# Altium PCB GTU-V1.1-20160516 .PcbDoc (part 1 of 4)
Units mil, origin at the board's own origin, x right, y up, seen from the top; angles counter-clockwise.
Board outline 6299.21 x 4330.71 mil, 4 copper layers (Top Layer, POWER, GND, Bottom Layer); 208 components, 165 nets, 695 pads, 347 vias.
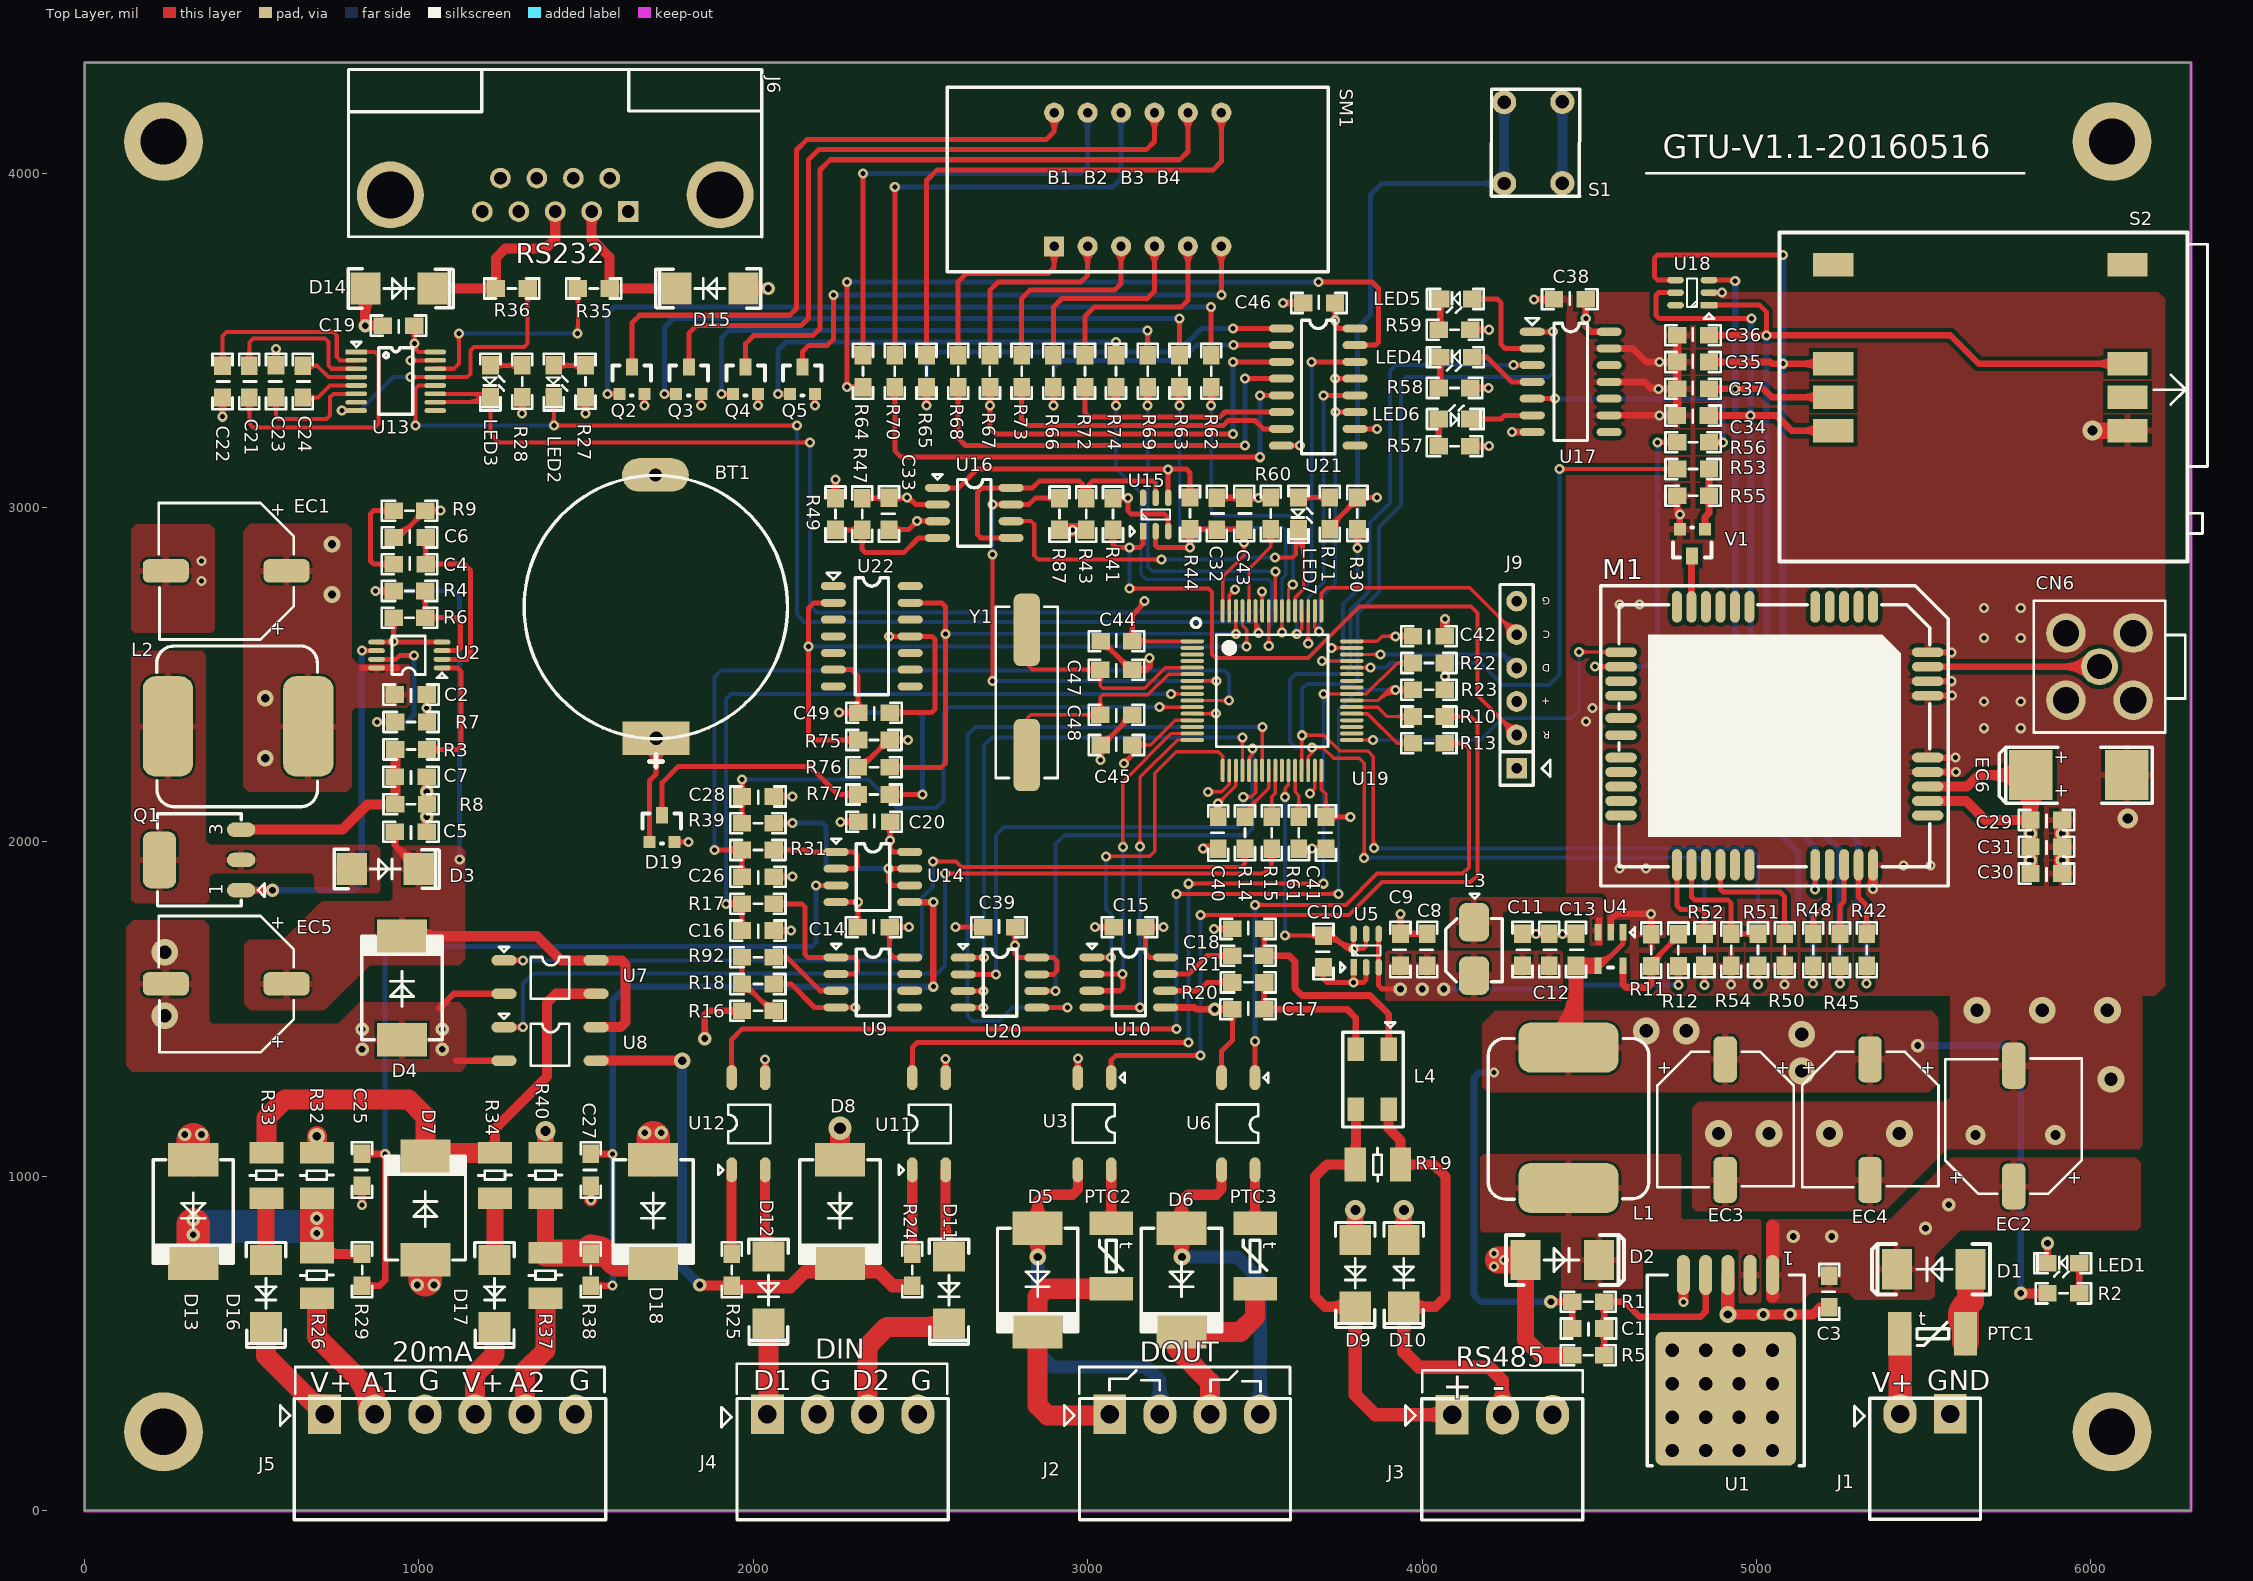
[diagram p0: Top Layer view]
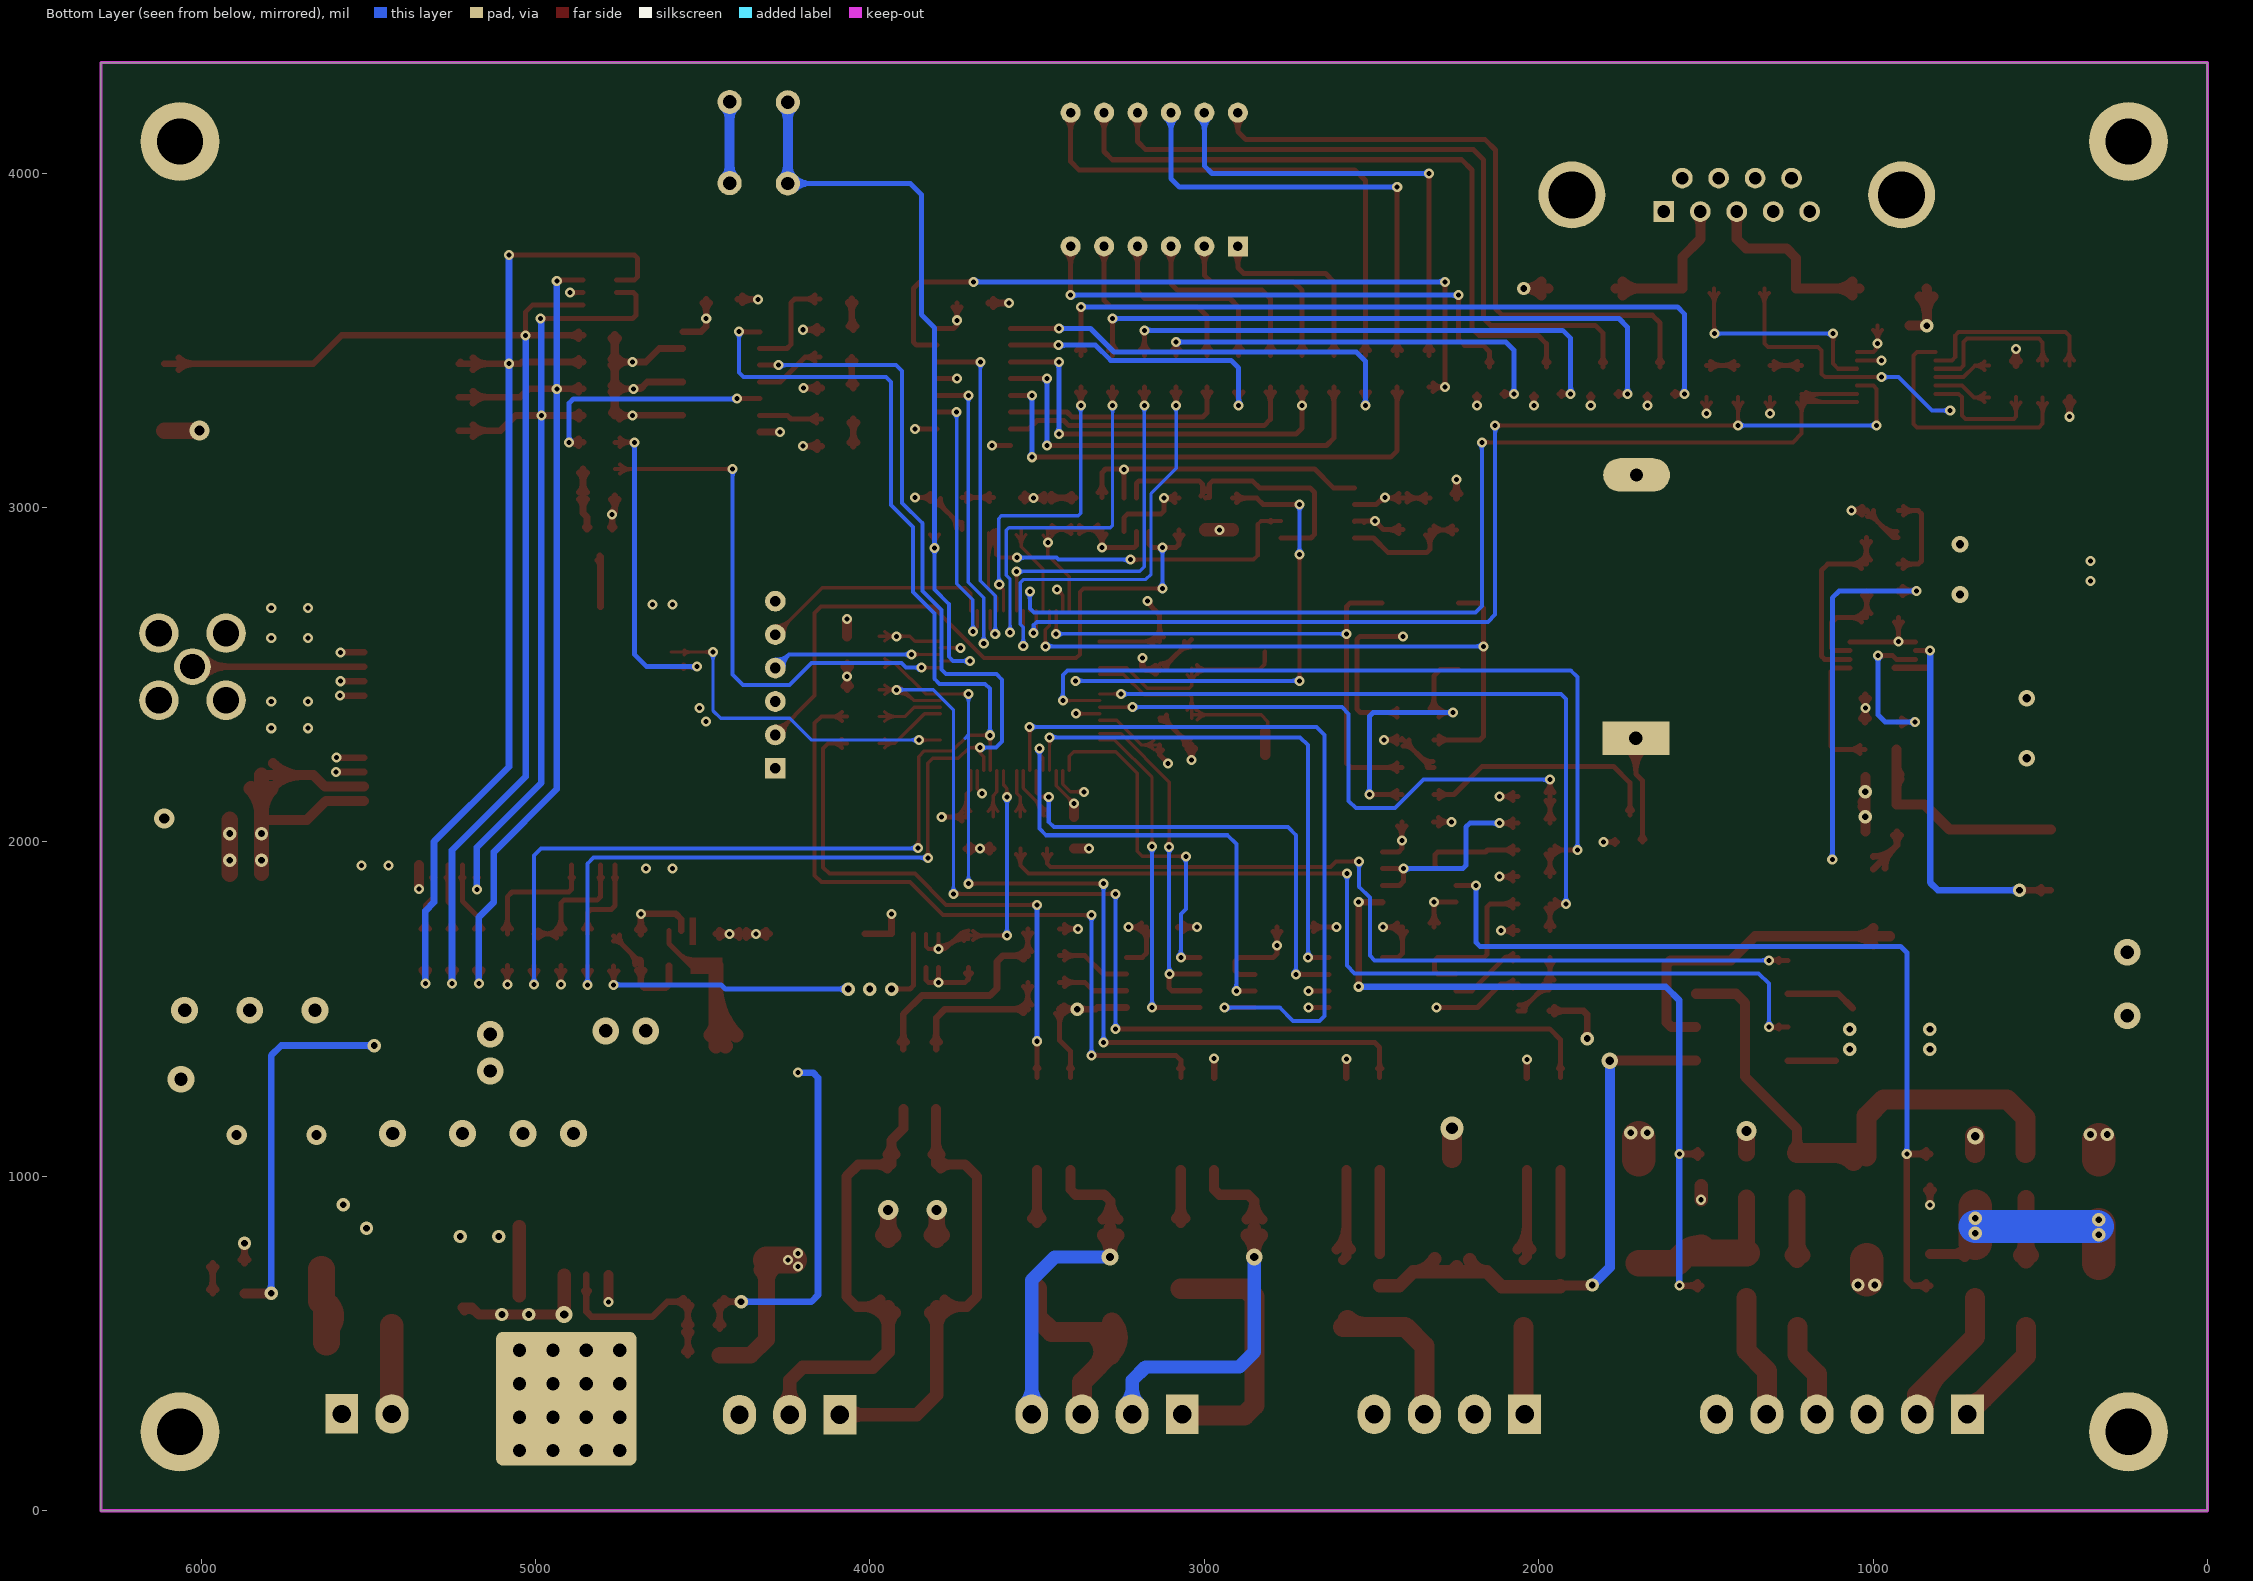
[diagram p1: Bottom Layer view, seen from below]
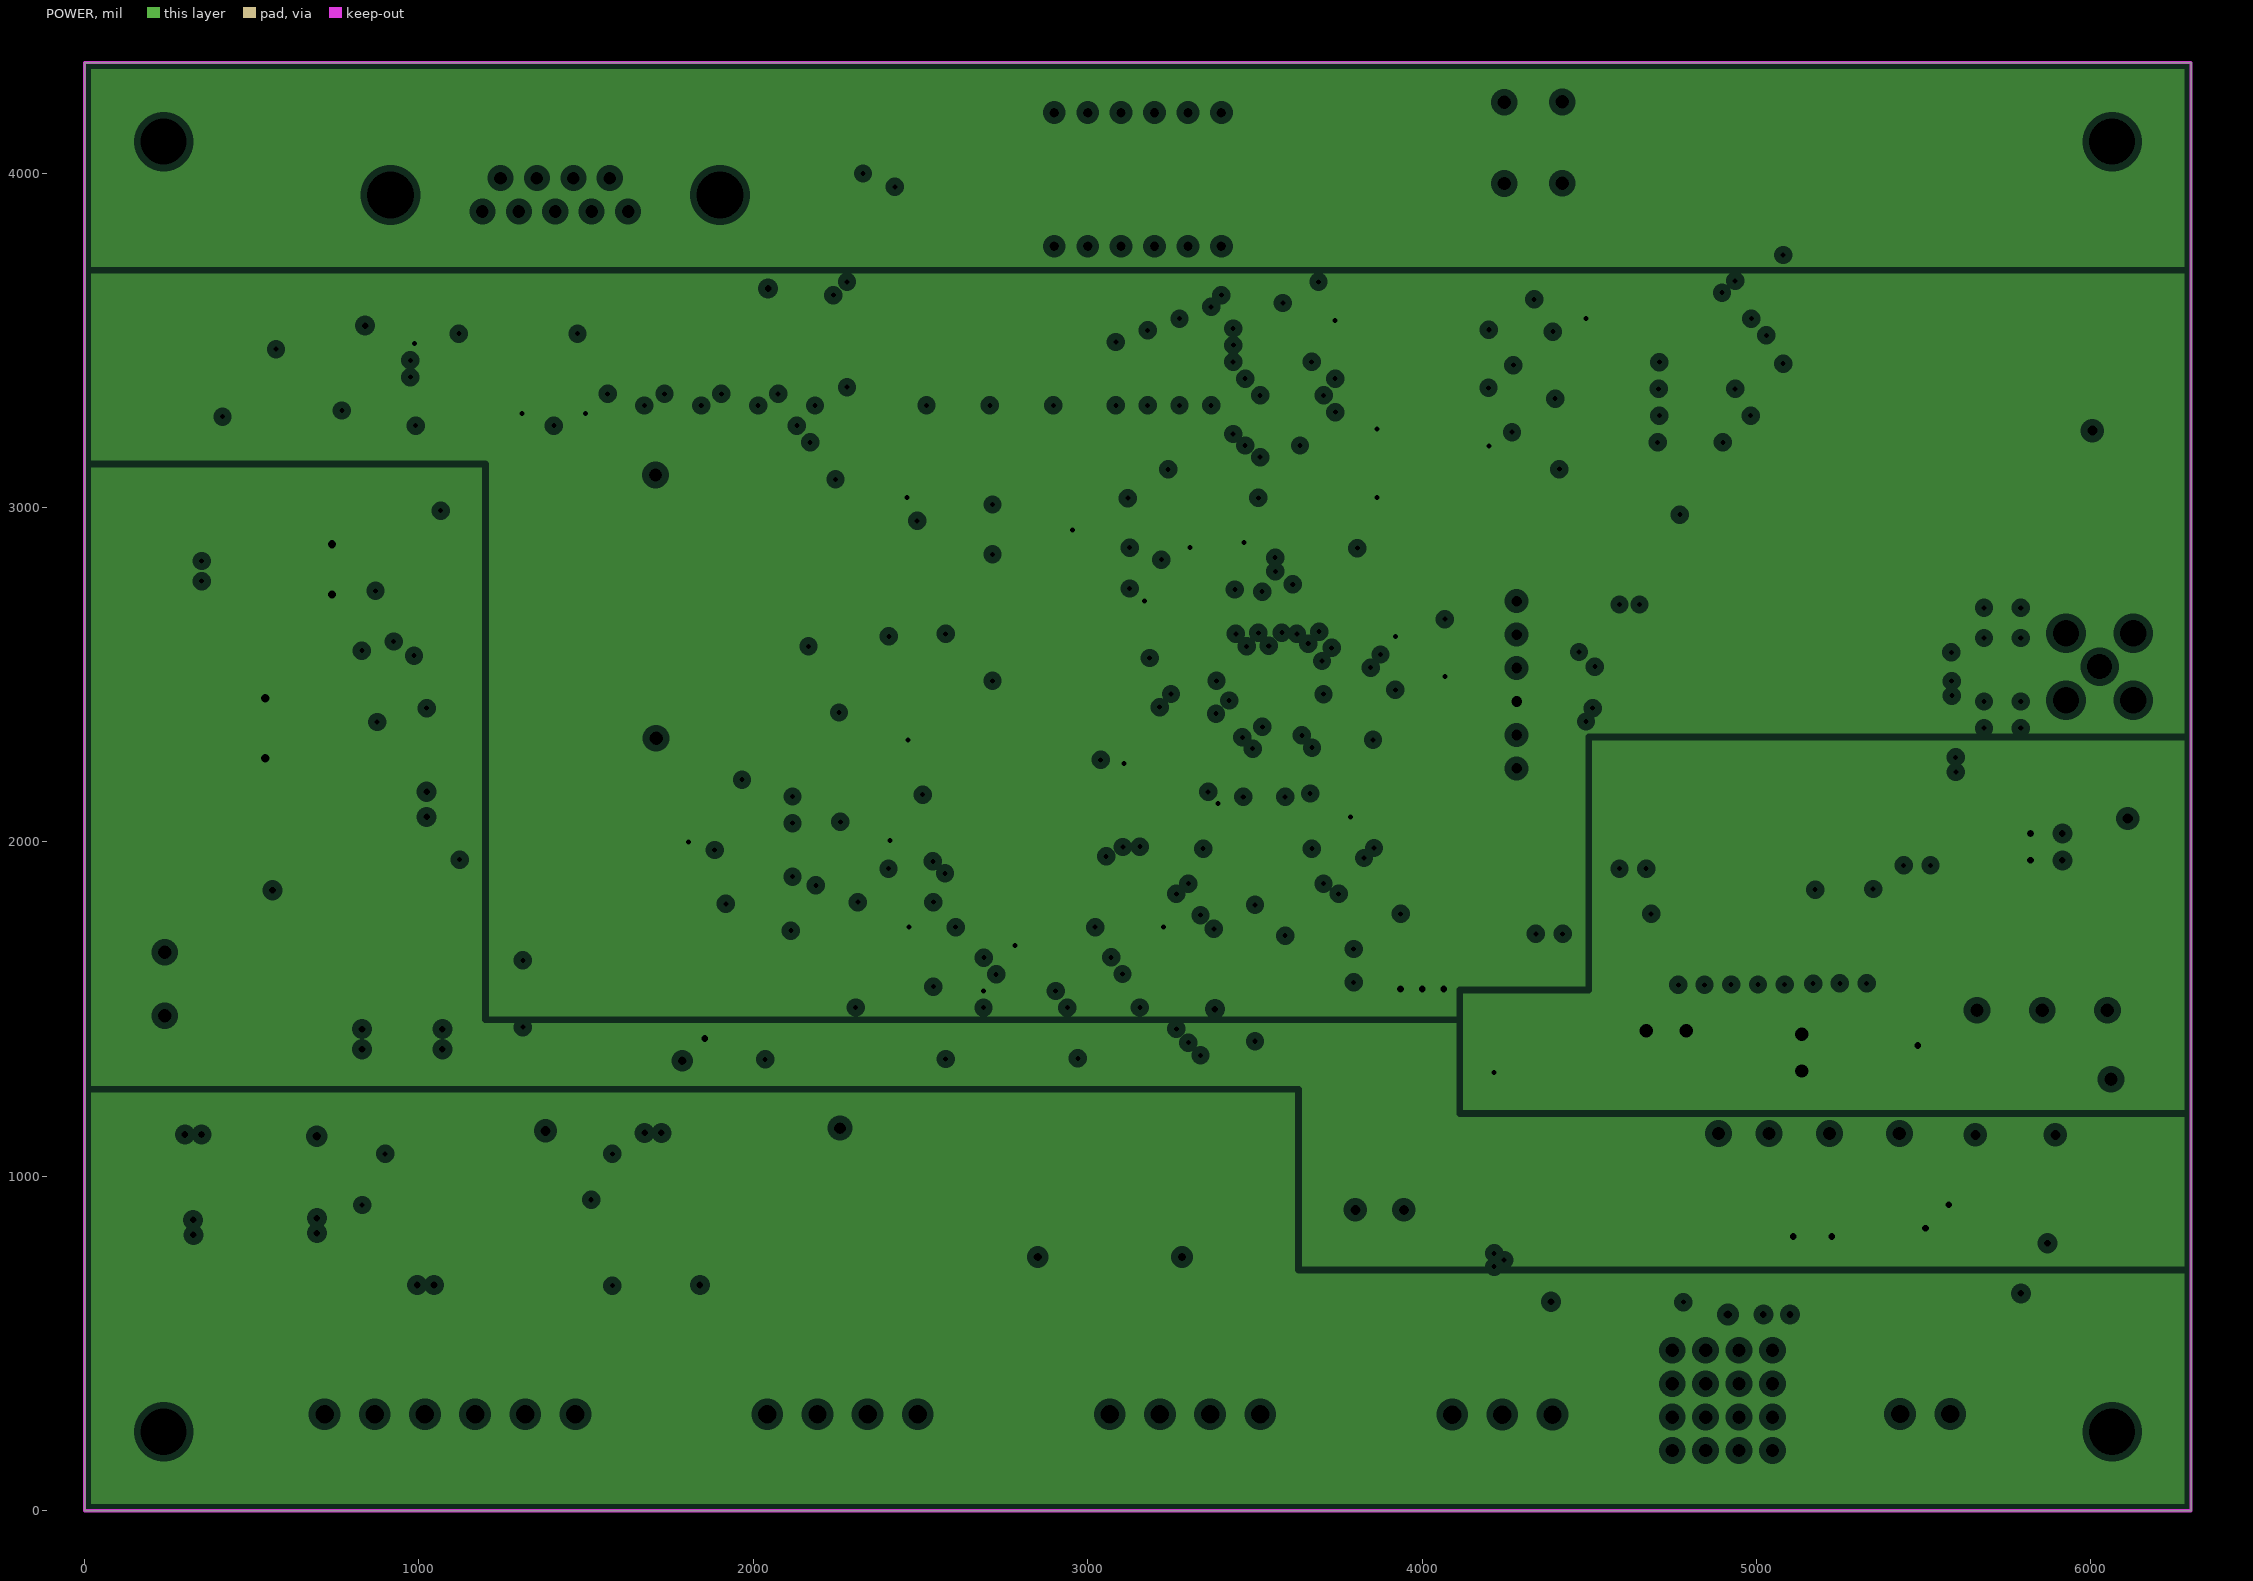
[diagram p2: POWER, clearances drawn from the general rule]
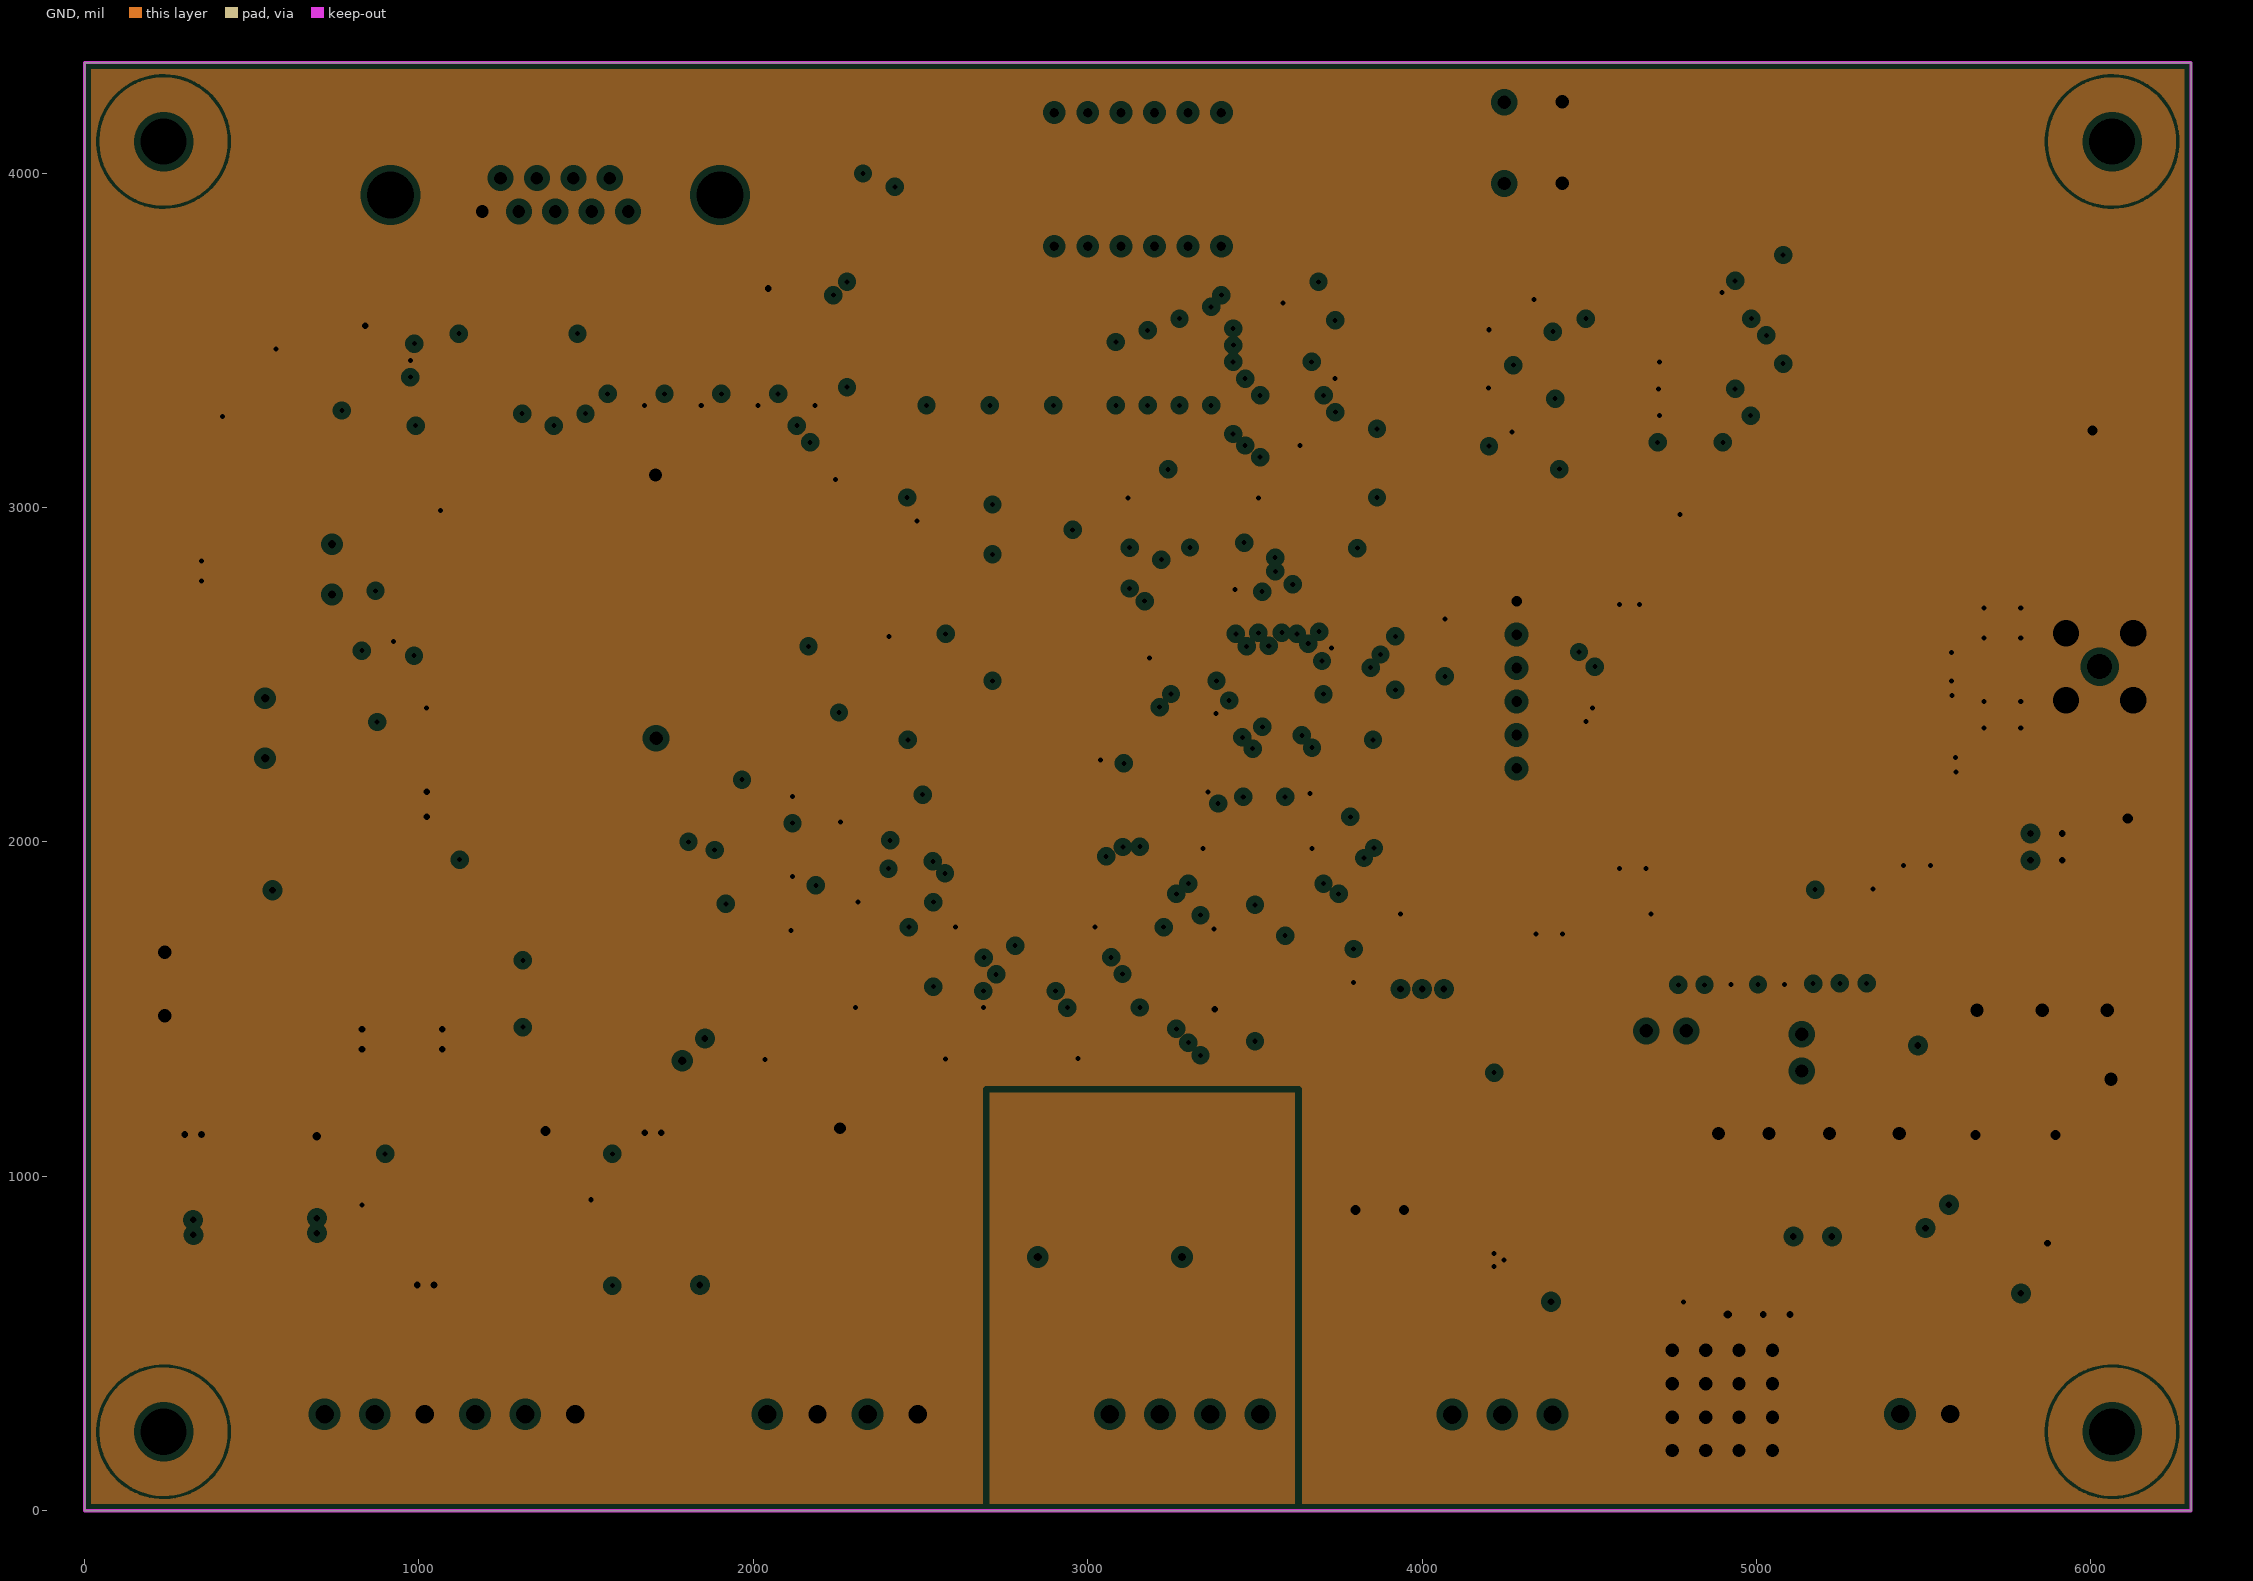
[diagram p3: GND, clearances drawn from the general rule]

## Layer stack, top to bottom
Top Layer: signal copper 1.4
Dielectric: core 12.6, FR-4, Dk 4.8
POWER: plane copper 1.4, net VCC_3V
Dielectric: prepreg 12.6, FR-4, Dk 4.8
GND: plane copper 1.4, net GND
Dielectric: core 12.6, FR-4, Dk 4.8
Bottom Layer: signal copper 1.4

## Board outline
0,0 6299.21,0 6299.21,4330.71 0,4330.71

## Design rules (kind name [scope] priority, off if disabled: settings)
Clearance [All] p1: gap=7
ComponentClearance [All] p1: gap=10 collisioncheckmode=3 verticalgap=10
HoleSize [All] p1: absolutevalues=TRUE maxlimit=300 minlimit=1 maxpercent=80.000 minpercent=20.000
PlaneClearance [All] p1: clearance=20
PlaneConnect [All] p1: planeconnectstyle=Relief reliefexpansion=20 reliefentries=4 reliefconductorwidth=10 reliefairgap=10
PolygonConnect 4 [(InComponent('CN6'))] p1: connectstyle=Direct reliefconductorwidth=10 reliefentries=4 polygonreliefangle="90 Angle"
PolygonConnect 3 [(InPadClass('All Pads'))] p2: connectstyle=Relief reliefconductorwidth=20 reliefentries=4 polygonreliefangle="90 Angle"
PolygonConnect 2 [(InNet('GND'))] p3: connectstyle=Direct reliefconductorwidth=20 reliefentries=4 polygonreliefangle="90 Angle"
PolygonConnect PolygonConnect_1 [All] p4: connectstyle=Relief reliefconductorwidth=10 reliefentries=4 polygonreliefangle="90 Angle"
RoutingVias [All] p1: holewidth=28 width=50 viastyle="Through Hole" minholewidth=15 minwidth=30 maxholewidth=150 maxwidth=300
SolderMaskExpansion [All] p1: expansion=4
TestPointUsage [All] p1: valid=0 allowmultiple=FALSE
Testpoint [All] p1: side=15 testpointundercomponent=TRUE minsize=40 maxsize=100 preferedsize=60 minholesize=0 maxholesize=40 preferedholesize=32 testpointgrid=1 style=1023 order=0-112345678
Width [All] p1: maxlimit=200 minlimit=10 preferedwidth=10
15 further rules are at their usual default settings.

## Classes and differential pairs
component class GTU-1-V1.0-20160311: C1 C2 C3 C4 C5 C6 C7 C8 C9 C10 C11 C12 C13 C14 C15 C16 C17 C18 C19 C20 C21 C22 C23 C24 C25 C26 C27 C28 D1 D2 D3 D4 D5 D6 D7 D8 D9 D10 D11 D12 D13 D14 D15 D16 D17 D18 EC1 EC2 EC3 EC4 EC5 J1 J2 J3 J4 J5 J6 L1 L2 L3 L4 LED1 LED2 LED3 PTC1 PTC2 PTC3 Q1 R1 R2 R3 R4 R5 R6 R7 R8 R9 R10 R11 R12 R13 R14 R15 R16 R17 R18 R19 R20 R21 R22 R23 R24 R25 R26 R27 R28 R29 R31 R32 R33 R34 R35 R36 R37 R38 R39 R40 R92 U1 U2 U3 U4 U5 U6 U7 U8 U9 U10 U11 U12 U13 U14
component class GTU-2-V1.0-20160311: BT1 C29 C30 C31 C32 C33 C34 C35 C36 C37 C38 C39 C40 C41 C42 C43 C44 C45 C46 C47 C48 C49 CN6 D19 EC6 J9 LED4 LED5 LED6 LED7 M1 Q2 Q3 Q4 Q5 R30 R41 R42 R43 R44 R45 R47 R48 R49 R50 R51 R52 R53 R54 R55 R56 R57 R58 R59 R60 R61 R62 R63 R64 R65 R66 R67 R68 R69 R70 R71 R72 R73 R74 R75 R76 R77 R87 S1 S2 SM1 U15 U16 U17 U18 U19 U20 U21 U22 V1 Y1
component class GTU原理图目录V1.0-20160311: *

## Components (designator, comment, footprint, x,y, rotation, side; value= is the part's Value field where it differs from the comment)
BT1 "CR2032" CR2032 1709.21,2310 r270 top locked
C1 "0.022u" 0805-C 4449.21,545 r0 top
C2 "0.1u" 0805-C 928.21,2440.61 r0 top
C3 "0.01u/50V" 0805-C 5217.6,703 r270 top
C4 "0.1u" 0805-C 1020.21,2830.61 r180 top
C5 "0.1u" 0805-C 928.21,2030.61 r0 top
C6 "0.1u" 0805-C 1020.21,2910.61 r180 top
C7 "0.1u" 0805-C 928.21,2194.61 r0 top
C8 "0.1u" 0805-C 4015,1630 r90 top
C9 "0.1u" 0805-C 3935,1630 r90 top
C10 "0.1u" 0805-C 3705,1720 r270 top
C11 "10u" 0805-C 4300,1630 r90 top
C12 "10u" 0805-C 4380,1630 r90 top
C13 "10u" 0805-C 4460,1630 r90 top
C14 "0.1u" 0805-C 2407.6,1745 r180 top
C15 "0.1u" 0805-C 3172.6,1745 r180 top
C16 "0.1u" 0805-C 1966.21,1735 r0 top
C17 "27p" 0805-C 3527.6,1500 r180 top
C18 "27p" 0805-C 3527.6,1740 r180 top
C19 "0.1u" 0805-C 891.21,3544 r0 top
C20 "0.1u" 0805-C 2409.21,2060 r180 top
C21 "0.1u" 0805-C 492.71,3329 r90 top
C22 "0.1u" 0805-C 412.71,3329 r90 top
C23 "0.1u" 0805-C 572.71,3425 r270 top
C24 "0.1u" 0805-C 652.71,3329 r90 top
C25 "4.7u" 0805-C 830,1067 r270 top
C26 "510p" 0805-C 1966.21,1896 r0 top
C27 "4.7u" 0805-C 1513.6,1067 r270 top
C28 "510p" 0805-C 1966.21,2136 r0 top
C29 "0.1u" 0805-C 5819.21,2065.39 r0 top
C30 "10pF" 0805-C 5819.21,1985.39 r0 top
C31 "33p" 0805-C 5819.21,1905.39 r0 top
C32 "0.1u" 0805-C 3385.6,2934 r90 top
C33 "0.1u" 0805-C 2405.6,3029 r270 top
C34 "0.1u" 0805-C 4761.6,3275 r0 top
C35 "33p" 0805-C 4857.6,3435 r180 top
C36 "33p" 0805-C 4857.6,3515 r180 top
C37 "33p" 0805-C 4857.6,3355 r180 top
C38 "0.1u" 0805-C 4489.21,3622.61 r180 top
C39 "0.1u" 0805-C 2782.6,1745 r180 top
C40 "0.1u" 0805-C 3390,2075 r270 top
C41 "0.1u" 0805-C 3712.6,2075 r270 top
C42 "0.1u" 0805-C 3972.6,2615 r0 top
C43 "0.1u" 0805-C 3467.6,2934 r90 top
C44 "0.1u" 0805-C 3133.6,2600 r180 top
C45 "10u" 0805-C 3133.6,2290 r180 top
C46 "0.1u" 0805-C 3739.21,3611.61 r180 top
C47 "20p" 0805-C 3037.6,2515 r0 top
C48 "20p" 0805-C 3037.6,2380 r0 top
C49 "1u" 0805-C 2313.21,2386.67 r0 top
CN6 "SMA-KWHD" SMA-KWHD 6025.6,2524 r0 top locked
D1 "SS34" SMB 5639.6,722 r180 top
D2 "SS34" SMB 4309.21,750 r0 top
D3 "MBRA1H100T3G" SMA 799.21,1919 r0 top
D4 "5.0SMDJ30A" SMC 949.21,1408 r270 top
D5 "5.0SMDJ30A" SMC 2850.21,845 r90 top locked
D6 "5.0SMDJ30A" SMC 3280.21,845 r90 top
D7 "5.0SMDJ30A" SMC 1019.21,750 r270 top
D8 "5.0SMDJ30A" SMC 2259.21,1050 r90 top
D9 "5.0SMDJ12A" SMA 3800,810 r270 top
D10 "5.0SMDJ12A" SMA 3945,810 r270 top
D11 "SM4007" SMA 2585.21,760 r270 top
D12 "SM4007" SMA 2045.21,760 r270 top
D13 "SMDJ5.0A" SMC 325.21,1050 r90 top
D14 "1SMAxxCAT3G" SMA 840.21,3655 r0 top
D15 "1SMA12CAT3G" SMA 1970.21,3655 r180 top
D16 "SM4007" SMA 542.6,750 r270 top
D17 "SM4007" SMA 1226.2,750 r270 top
D18 "SMDJ5.0A" SMC 1700.21,1050 r90 top
D19 "BAT54C" BAT54S/SOT-23 1689.21,2000 r0 top
EC1 "150u/63V" SMD10X10.5 603.95,2810.61 r270 top locked
EC2 "CAP Al" SMD10X10.5 5769.21,970 r180 top locked
EC3 "470u/25V" SMD10X10.5 4906.21,1350 r0 top locked
EC4 "470u/25V" SMD10X10.5 5339.21,1350 r0 top
EC5 "150u/63V" SMD10X10.5 603.95,1575.61 r270 top
EC6 "100uF" 7361-V 5820.21,2200 r180 top
J1 "CON2" 15EDGRC-3.81-2P 5669.6,336.63 r180 top locked
J2 "CON4" 15EDGRC-3.81-4P 2975.21,335.63 r0 top locked
J3 "CON3" 15EDGRC-3.81-3P 3999.21,334.65 r0 top locked
J4 "CON4" 15EDGRC-3.81-4P 1951.21,335.63 r0 top locked
J5 "20mA输入" 15EDGRC-3.81-6P 627.21,335.63 r0 top locked
J6 "DB9针" DB9RA/M 1625.6,3885 r0 top
J9 "ST_SWD" SWD_DOWNLOAD 4282.6,2220 r180 top
L1 "SLF12575T-470M2R7-PF" SLF12575 4437.6,965 r90 top
L2 "SLF12555T-221" SLF12575 249.21,2345.61 r0 top
L3 "SPM4020T-4R7M" SPM4020T-4R7M 4155,1680 r270 top locked
L4 "ACT45B-510-2P" ACT45B 3900,1380 r270 top
LED1 "绿色" 0805-LED 5965,740 r180 top
LED2 "LED" 0805-LED 1403.38,3425 r270 top
LED3 "LED" 0805-LED 1213.71,3425 r270 top
LED4 "RED" 0805-LED 4149.21,3449.61 r180 top
LED5 "RED" 0805-LED 4149.21,3623.61 r180 top
LED6 "RED" 0805-LED 4049.21,3264.61 r0 top
LED7 "LED" 0805-LED 3630.1,3030 r270 top
M1 "M35" M35 5348.6,2703 r270 top locked
PTC1 "1812014" 1812l075 5428.6,529 r0 top
PTC2 "1812010" 1812l075 3070.21,860 r270 top
PTC3 "1812010" 1812l075 3500.21,860 r270 top
Q1 "NDT3055" SOT-223 468.31,1855.61 r90 top
Q2 "MMBT5551" SOT-23 1599.21,3340 r0 top
Q3 "MMBT5551" SOT-23 1769.21,3340 r0 top
Q4 "MMBT5551" SOT-23 1939.21,3340 r0 top
Q5 "MMBT5551" SOT-23 2109.21,3340 r0 top
R1 "2K3/1%" 0805-R 4544.21,625 r180 top
R2 "1K" 0805-R 5870,650 r0 top
R3 "RES" 0805-R 1024.21,2276.61 r180 top
R4 "RES" 0805-R 1019.21,2750.61 r180 top
R5 "1K/1%" 0805-R 4544.21,465 r180 top
R6 "RES" 0805-R 924.21,2670.61 r0 top
R7 "RES" 0805-R 1024.21,2358.61 r180 top
R8 "RES" 0805-R 1024.21,2112.61 r180 top
R9 "RES" 0805-R 1019.21,2990.61 r180 top
R10 "RES" 0805-R 3972.6,2375 r0 top
R11 "200K" 0805-R 4685,1724 r270 top
R12 "806K" 0805-R 4766.21,1724 r270 top
R13 "RES" 0805-R 3972.6,2295 r0 top
R14 "RES" 0805-R 3470,2075 r270 top
R15 "RES" 0805-R 3550,2075 r270 top
R16 "RES" 0805-R 2061.21,1495 r180 top
R17 "RES" 0805-R 2061.21,1815 r180 top
R18 "RES" 0805-R 2061.21,1575 r180 top
R19 "120R" 1210-R 3800.21,1035 r0 top
R20 "10R" 0805-R 3527.6,1580 r180 top
R21 "10R" 0805-R 3527.6,1660 r180 top
R22 "RES" 0805-R 3972.6,2535 r0 top
R23 "RES" 0805-R 3972.6,2455 r0 top
R24 "RES" 0805-R 2475.21,673 r90 top
R25 "RES" 0805-R 1935.21,673 r90 top
R26 "33R" 1210-R 694.8,771 r270 top
R27 "RES" 0805-R 1498.21,3425 r270 top
R28 "RES" 0805-R 1308.55,3425 r270 top
R29 "200K" 0805-R 830,673 r90 top
R30 "1K" 0805-R 3806.35,2935 r90 top
R31 "51R" 0805-R 1966.21,1976 r0 top
R32 "150R" 1210-R 694.8,1070 r270 top
R33 "33R" 1210-R 543.6,1070 r270 top
R34 "33R" 1210-R 1227.2,1070 r270 top
R35 "RES" 0805-R 1570.21,3655 r180 top
R36 "RES" 0805-R 1230.21,3655 r0 top
R37 "33R" 1210-R 1378.4,771 r270 top
R38 "200K" 0805-R 1513.6,673 r90 top
R39 "51R" 0805-R 1966.21,2056 r0 top
R40 "150R" 1210-R 1378.4,1070 r270 top
R41 "RES" 0805-R 3075.6,3028 r270 top
R42 "20R" 0805-R 5329.21,1725 r270 top
R43 "10K" 0805-R 2995.6,3028 r270 top
R44 "10K" 0805-R 3305.6,3030 r270 top
R45 "20R" 0805-R 5249.21,1725 r270 top
R47 "1.6K" 0805-R 2325.6,2933 r90 top
R48 "20R" 0805-R 5169.21,1725 r270 top
R49 "402R" 0805-R 2245.6,3028 r270 top
R50 "0R" 0805-R 5084.21,1725 r270 top
R51 "1K" 0805-R 5004.21,1725 r270 top
R52 "1K" 0805-R 4844.21,1725 r270 top
R53 "4.7K" 0805-R 4762.6,3115 r0 top
R54 "5K6" 0805-R 4924.21,1630 r90 top
R55 "4.7K" 0805-R 4857.6,3035 r180 top
R56 "4K7" 0805-R 4762.6,3195 r0 top
R57 "1K" 0805-R 4144.21,3183.61 r180 top
R58 "1K" 0805-R 4049.21,3357.61 r0 top
R59 "1K" 0805-R 4049.21,3531.61 r0 top
R60 "510R" 0805-R 3547.6,3030 r270 top
R61 "510R" 0805-R 3631.35,2075 r270 top
R62 "RES" 0805-R 3369.21,3360 r90 top
R63 "RES" 0805-R 3274.21,3360 r90 top
R64 "330R" 0805-R 2328.05,3360 r90 top
R65 "330R" 0805-R 2517.71,3360 r90 top
R66 "330R" 0805-R 2897.05,3360 r90 top
R67 "330R" 0805-R 2707.38,3360 r90 top
R68 "330R" 0805-R 2612.55,3360 r90 top
R69 "RES" 0805-R 3179.21,3360 r90 top
R70 "330R" 0805-R 2422.88,3360 r90 top
R71 "510R" 0805-R 3723.85,3030 r270 top
R72 "330R" 0805-R 2991.88,3360 r90 top
R73 "330R" 0805-R 2802.21,3360 r90 top
R74 "RES" 0805-R 3084.21,3360 r90 top
R75 "20K" 0805-R 2313.21,2305 r0 top
R76 "20K" 0805-R 2408,2223 r180 top
R77 "1K" 0805-R 2408,2142 r180 top
R87 "10K" 0805-R 2915.6,3028 r270 top
R92 "RES" 0805-R 2061.21,1655 r180 top
S1 "SW-PB" JMP 4419.21,3970 r90 top
S2 "SIMHOLDER" SIM-HOLDER 6109.21,3230 r180 top locked
SM1 "SR420361K" SR420361 2899.6,3781 r0 top locked
U1 "LM2596" D2PAK-5 5047.6,705 r180 top locked
U2 "LM3488" MSOP-8 1069.21,2520.61 r180 top locked
U3 "TLP187" TLP187 3070.21,1295 r270 top
U4 "NCP1529ASNT1G" SOT-23-5 4600.83,1729.78 r180 top
U5 "ADR3425ARJZ" SOT-23-6 3795,1625 r0 top locked
U6 "TLP187" TLP187 3500.21,1295 r270 top
U7 "TLP187" TLP187 1254.21,1646 r0 top locked
U8 "TLP187" TLP187 1254.21,1446 r0 top locked
U9 "OPA2340UA" SO-8 2247.6,1655 r0 top locked
U10 "ISL83075EIBZA" SO-8 3012.6,1655 r0 top locked
U11 "TLP187" TLP187 2475.21,1019.41 r90 top
U12 "TLP187" TLP187 1935.21,1019.41 r90 top
U13 "SP3232EEY" TSSOP-16 812.71,3465 r0 top locked
U14 "OPA2340UA" SO-8 2247.6,1970 r0 top locked
U15 "NLAST4599DTT1G" SOT-23-6 3165.6,2929 r0 top
U16 "CAT706SVI" SO-8 2550.6,3059 r0 top locked
U17 "74HC04" SO-14 4329.21,3525.61 r0 top
U18 "CM1213A-04SO" SOT-23-6 4857.6,3605 r90 top
U19 "STM32F103RCT6" LQFP-64 3312.6,2600 r0 top locked
U20 "FM25L16B" SO-8 2627.6,1654.22 r0 top locked
U21 "74HC595" SO-16 3579.21,3535.39 r0 top locked
U22 "RX-8025SA" SO-14 2239.21,2765 r0 top
V1 "MMBT5551" SOT-23 4845.6,2935 r180 top
Y1 "8MHz" SM-49 2817.6,2260 r90 top locked

## Footprints (in the part's own frame and the unit in brackets; to place one, negate y for a bottom-side part, rotate by r counter-clockwise, add the part's x,y. Pads: shape width x height; smd on the part's side, far side on the other; paste and mask are expansions set on the pad)
15EDGRC-3.81-2P [mm]
  rect 2.5x3 hole 1.4: 1(2.3,1.2)
  oval 2.5x3 hole 1.4: 2(6.11,1.2)
  silkscreen extent 0,0 8.41,9.2
15EDGRC-3.81-3P [mm]
  rect 2.5x3 hole 1.4: 1(2.3,-1.2)
  oval 2.5x3 hole 1.4: 2(6.11,-1.2) 3(9.92,-1.2)
  silkscreen extent 0,-9.2 12.22,0
15EDGRC-3.81-4P [mm]
  rect 2.5x3 hole 1.4: 1(2.3,-1.2)
  oval 2.5x3 hole 1.4: 2(6.11,-1.2) 3(9.92,-1.2) 4(13.73,-1.2)
  silkscreen extent 0,-9.2 16.03,0
15EDGRC-3.81-6P [mm]
  rect 2.5x3 hole 1.4: 1(2.3,-1.2)
  oval 2.5x3 hole 1.4: 2(6.11,-1.2) 3(9.92,-1.2) 4(13.73,-1.2) 5(17.54,-1.2) 6(21.35,-1.2)
  silkscreen extent 0,-9.2 23.65,0
0805-C [mil]
  rect 55x50 smd: 1(0,0) 2(95,0)
  silkscreen extent -35,-30 131,30
0805-LED [mil]
  rect 55x50 smd: 1(0,0) 2(95,0)
  silkscreen extent -35,-30 135,41
0805-R [mil]
  rect 55x50 smd: 1(0,0) 2(95,0)
  silkscreen extent -35,-30 130,30
1210-R [mil]
  rect 64x102 smd: 1(0,0) 2(135,0)
  silkscreen extent 53,-50 79,50
1812l075 [mil]
  rect 70x130 smd: 1(0,0) 2(196.06,0)
  silkscreen extent 51,-35 146,35
7361-V [mil]
  rect 130x150 smd: 1(0,0) 2(-287.4,0)
  silkscreen extent -363,-83 95,84
ACT45B [mil]
  rect 70x50 smd: 1(0,0) 2(0,-98.43) 3(179.13,-98.43) 4(179.13,0)
  silkscreen extent -80,-138 232,43
BAT54S/SOT-23 [mil]
  rect 36x36 smd: 1(0,0) 2(75,0)
  rect 36x50 smd: 3(38,80)
  silkscreen extent -20,-5 95,85
CR2032 [mil]
  rect 100x200 hole 40: 1(0,0)
  oval 100x200 hole 40: 2(-787.4,-1.97)
  silkscreen extent -786,-395 87,393
D2PAK-5 [mil]
  rrect10% 420x400 smd far side: 0(140,370)
  oval 39.17x120 smd: 1(0,0) 2(66.67,0) 3(133.33,0) 4(200,0) 5(266.67,0)
  rrect10% 420x400 smd: 1(140,370)
  silkscreen extent -95,0 375,570
DB9RA/M [mil]
  rect 62x62 hole 38: 1(0,0)
  round 62 hole 38: 2(-109,0) 3(-218,0) 4(-327,0) 5(-436,0) 6(-55,100) 7(-164,100) 8(-273,100) 9(-382,100)
  round 200 hole 140: ""(-711,50) ""(275,50)
  silkscreen extent -836,-75 400,425
JMP [mil]
  round 72 hole 40: 1(0,0) 2(-1,174) 3(242,174) 4(243,0)
  silkscreen extent -39,-53 281,213
LQFP-64 [mm]
  oval 1.778x0.3 smd: 1(0,0) 2(0,-0.5) 3(0,-1) 4(0,-1.5) 5(0,-2) 6(0,-2.5) 7(0,-3) 8(0,-3.5) 9(0,-4) 10(0,-4.5) 11(0,-5) 12(0,-5.5) 13(0,-6) 14(0,-6.5) 15(0,-7) 16(0,-7.5) 33(12.116,-7.5) 34(12.116,-7) 35(12.116,-6.5) 36(12.116,-6) 37(12.116,-5.5) 38(12.116,-5) 39(12.116,-4.5) 40(12.116,-4) 41(12.116,-3.5) 42(12.116,-3) 43(12.116,-2.5) 44(12.116,-2) 45(12.116,-1.5) 46(12.116,-1) 47(12.116,-0.5) 48(12.116,0)
  oval 0.3x1.778 smd: 17(2.308,-9.808) 18(2.808,-9.808) 19(3.308,-9.808) 20(3.808,-9.808) 21(4.308,-9.808) 22(4.808,-9.808) 23(5.308,-9.808) 24(5.808,-9.808) 25(6.308,-9.808) 26(6.808,-9.808) 27(7.308,-9.808) 28(7.808,-9.808) 29(8.308,-9.808) 30(8.808,-9.808) 31(9.308,-9.808) 32(9.808,-9.808) 49(9.808,2.308) 50(9.308,2.308) 51(8.808,2.308) 52(8.308,2.308) 53(7.808,2.308) 54(7.308,2.308) 55(6.808,2.308) 56(6.308,2.308) 57(5.808,2.308) 58(5.308,2.308) 59(4.808,2.308) 60(4.308,2.308) 61(3.808,2.308) 62(3.308,2.308) 63(2.808,2.308) 64(2.308,2.308)
  silkscreen extent -0.07,-8 10.31,1.75
M35 [mm]
  oval 2.4x0.75 smd: 1(0,0) 2(0,-1.1) 3(0,-2.2) 4(0,-3.3) 5(0,-4.4) 6(0,-9.4) 7(0,-10.5) 8(0,-11.6) 9(0,-12.7) 10(0,-13.8) 11(0,-14.9) 21(19.6,-14.9) 22(19.6,-13.8) 23(19.6,-12.7) 24(19.6,-11.6) 25(19.6,-10.5) 26(19.6,-9.4) 27(19.6,-4.4) 28(19.6,-3.3) 29(19.6,-2.2) 30(19.6,-1.1) 31(19.6,0)
  oval 0.75x2.4 smd: 12(3.45,-19.15) 13(4.55,-19.15) 14(5.65,-19.15) 15(6.75,-19.15) 16(11.45,-19.15) 17(12.55,-19.15) 18(13.65,-19.15) 19(14.75,-19.15) 20(15.85,-19.15) 32(15.85,4.15) 33(14.75,4.15) 34(13.65,4.15) 35(12.55,4.15) 36(11.45,4.15) 37(6.75,4.15) 38(5.65,4.15) 39(4.55,4.15) 40(3.45,4.15) 41(8.45,-19.15) 42(9.75,-19.15)
  silkscreen extent -1.6,-20.7 21.2,5.7
MSOP-8 [mil]
  oval 50x15 smd: 1(0,0) 2(0,-25.59) 3(0,-51.18) 4(0,-76.77) 5(196,-76.77) 6(196,-51.18) 7(196,-25.59) 8(196,0)
  silkscreen extent -15,-95 150,30
SIM-HOLDER [mil]
  rect 120x70 smd: 1(879.92,0) 2(879.92,-100) 3(879.92,-200) 4(0,0) 5(0,-100) 6(0,-200) 7(0,-496.06) 8(879.92,-496.06)
  silkscreen extent -239,-593 1041,392
SLF12575 [mil]
  rrect50% 150x300 smd: 1(0,0) 2(420,0)
  silkscreen extent -33,-240 447,240
SM-49 [mm]
  rrect50% 5.5x2 smd: 1(0,0) 2(9.5,0)
  silkscreen extent -1.75,-2.35 11.25,2.35
SMA [mil]
  rect 90x95 smd: A(0,0) K(200,0)
  silkscreen extent -52,-59 262,59
SMA-KWHD [mm]
  round 2.794 hole 1.905: 1(0,0)
  round 3 hole 2: 2(2.55,2.55) 3(2.55,-2.55) 4(-2.55,-2.55) 5(-2.55,2.55)
  silkscreen extent -5,-5 6.5,5
SMB [mil]
  rect 89.37x120 smd: A(0,0) K(220,0)
  silkscreen extent -58,-75 294,75
SMC [mil]
  rect 100x150 smd: A(0,0) K(-310,0)
  silkscreen extent -310,-120 0,120
SMD10X10.5 [mil]
  rrect50% 70x137.8 smd: 1(0,0) 2(0,-360.83)
  silkscreen extent -203,-382 205,22
SO-8 [mil]
  oval 75x24 smd: 1(0,0) 2(0,-50) 3(0,-100) 4(0,-150) 5(220,-150) 6(220,-100) 7(220,-50) 8(220,0)
  silkscreen extent -15,-175 160,40
SO-14 [mil]
  oval 75x24 smd: 1(0,0) 2(0,-50) 3(0,-100) 4(0,-150) 5(0,-200) 6(0,-250) 7(0,-300) 8(230,-300) 9(230,-250) 10(230,-200) 11(230,-150) 12(230,-100) 13(230,-50) 14(230,0)
  silkscreen extent -20,-325 165,40
SO-16 [mil]
  oval 75x24 smd: 1(0,0) 2(0,-50) 3(0,-100) 4(0,-150) 5(0,-200) 6(0,-250) 7(0,-300) 8(0,-350) 9(220,-350) 10(220,-300) 11(220,-250) 12(220,-200) 13(220,-150) 14(220,-100) 15(220,-50) 16(220,0)
  silkscreen extent 60,-375 160,25
SOT-23 [mil]
  rect 36x36 smd: 1(0,0) 2(75,0)
  rect 36x50 smd: 3(38,80)
  silkscreen extent -20,-5 95,85
SOT-23-5 [mil]
  rect 20x50 smd: 1(0,0) 2(37,0) 3(75,0) 4(75,100) 5(0,100)
  silkscreen extent -35,-15 45,105
SOT-23-6 [mil]
  rect 20x50 smd: 1(0,0)
  oval 20x50 smd: 2(37.5,0) 3(75,0) 4(75,100) 5(37.5,100) 6(0,100)
  silkscreen extent -40,-15 80,65
SOT-223 [mm]
  oval 1.1x2.15 smd: 1(0,0) 2(2.3,0) 3(4.6,0)
  rrect50% 4.318x2.54 smd: 4(2.3,6.2)
  silkscreen extent -1.2,-1.78 5.8,6.35
SPM4020T-4R7M [mm]
  rrect50% 2.92x2.3 smd: 1(-2.031,0) 2(2.031,0)
  silkscreen extent -4.19,-2.15 2.51,2.15
SR420361 [mil]
  rect 60x60 hole 28: 1(0,0)
  round 60 hole 28: 2(100,0) 3(200,0) 4(300,0) 5(400,0) 6(500,0) 7(500,400) 8(400,400) 9(300,400) 10(200,400) 11(100,400) 12(0,400)
  silkscreen extent -320,-76 820,476
SWD_DOWNLOAD [mil] "SWD方式下载程序接口"
  rect 62x62 hole 32: 1(0,0)
  round 62 hole 32: 2(0,-100) 3(0,-200) 4(0,-300) 5(0,-400) 6(0,-500)
  silkscreen extent -100,-550 50,50
TLP187 [mil]
  oval 75x32 smd: 1(0,0) 3(0,-100) 4(275.59,-100) 6(275.59,0)
  silkscreen extent -15,-115 195,40
TSSOP-16 [mil]
  rect 65x14 smd: 1(0,0)
  oval 65x14 smd: 2(0,-25) 3(0,-50) 4(0,-75) 5(0,-100) 6(0,-125) 7(0,-150) 8(0,-175) 9(236,-175) 10(236,-150) 11(236,-125) 12(236,-100) 13(236,-75) 14(236,-50) 15(236,-25) 16(236,0)
  silkscreen extent -15,-186 168,30

## Part data
BT1: library part BATTERY, "Battery"
C1 C2 C3 C4 C5 C6 C7 C8 C9 C10 C11 C12 C13 C14 C15 C16 C17 C18 C19 C20 C21 C22 C23 C24 C25 C26 C27 C28 C29 C30 C31 C32 C33 C34 C35 C36 C37 C38 C39 C40 C41 C42 C43 C44 C45 C46 C47 C48 C49: library part CAP, "Capacitor"
CN6: "RF插座"
D1 D2 D11 D12 D16 D17: library part DIODE, "Diode"
D3: library part 1N4148, "100V 70mA开关二极管"
D4 D5 D6 D7 D8: library part 5.0SMDJxxA, "bidirectional  5000W TVS"
D9 D10: library part 1SMA12AT
D13 D18: library part TVS
D14: "400W双向TVS  ON Semconductor"
D15: library part 1SMAxxCAT3G, "400W双向TVS  ON Semconductor"
EC1 EC5: library part "CAP Al", "铝电解电容"
EC2: "铝电解电容"
EC3 EC4: library part "CAP Al"
EC6: library part "CAP Tan"
J1 J2 J3 J4: "Connector"
J5: library part CON6, "Connector"
J6: library part DB9
J9: "STM32 SWD调试端口"
L1: library part "INDUCTOR IRON"
L2: library part SLF12575, "12.5X12.5X7.5mm屏蔽功率电感"
L3: library part INDUCTOR
LED1 LED4 LED5 LED6: library part LED
PTC1 PTC2 PTC3: library part BK30-500, "自恢复熔丝"
Q1: "2A 60V NMOS"
Q2 Q3 Q4 Q5: "NPN Transistor 160V 0.6A"
R1 R2 R5 R11 R12 R19 R20 R21 R26 R29 R30 R31 R32 R33 R34 R37 R38 R39 R40 R42 R43 R44 R45 R48 R50 R51 R52 R53 R54 R55 R56 R57 R58 R59 R60 R61 R64 R65 R66 R67 R68 R70 R71 R72 R73 R75 R76 R77 R87: library part RES
R3 R4 R6 R7 R8 R9 R10 R13 R14 R15 R16 R17 R18 R22 R23 R24 R25 R27 R28 R35 R36 R41 R62 R63 R69 R74 R92: "电阻"
R47 R49: library part RES, "电阻"
S1: "轻触按钮"
SM1: library part SR420361, "共阴极0.28寸4位数码管品牌ARK"
U1: library part LM2596DSADJR4G
U2: library part "LM3488MM NOPB", "ANALOG LM3488MM CMS"
U3 U6 U7 U8 U11 U12: "Darlington Photocouple Trsnsistor"
U5: library part ADR3430ARJZ
U9 U14: library part OPA2340, "双运放"
U10: library part 75LBC184
U13: library part SP3232EEA, "+3.3V 1Mbps RS232收发器 SIPEX"
U16: library part SP706T
U20: library part FM25256B
U21: "8位移位寄存器"
V1: "贴片NPN"
Y1: library part CRYSTAL, "Crystal"

## Free pads (board coordinates)
  round 236.22 hole 137.8: 1(236.22,4094.49) 2(6062.99,4094.49) 3(6062.99,236.22) 4(236.22,236.22)

## Via types
v1: diameter 30, hole 15, Top Layer to Bottom Layer, 261 vias
v2: diameter 40, hole 20, Top Layer to Bottom Layer, 39 vias
v3: diameter 40, hole 40, Top Layer to Bottom Layer, 16 vias
v4: diameter 80, hole 40, Top Layer to Bottom Layer, 14 vias
v5: diameter 50, hole 25, Top Layer to Bottom Layer, 9 vias
v6: diameter 60, hole 30, Top Layer to Bottom Layer, 7 vias
v7: diameter 70, hole 35, Top Layer to Bottom Layer, 1 vias

## Nets (pads, with @x,y where several pads share a name; then routed paths per layer and width w, separated by ;. In a path a pad name is that pad's centre, name@x,y a point inside that pad or via, vN(x,y) a via of type N, cw(c..) or ccw(c..) an arc to the next point about the centre after c; other vN are vias at no path point)
20MA1: J5.2 R26.2 | length 548.6
  Top Layer w60: R26.2@694.8,636 694.8,520.2 867.76,347.24 J5.2@867.76,288.39 ; 800.31,414.69 cw(c683.85,298.23) J5.2@848.55,298.23
20MA2: J5.5 R37.2 | length 333.4
  Top Layer w60: J5.5@1317.76,327.76 1317.76,418.55 1378.4,479.19 R37.2@1378.4,636
ADC1: C16.1 R17.2 U19.9 | length 2475.5
  Top Layer w10: v1(3249,2442.52) U19.9@3312.6,2442.52 ; v1@3256.07,2435.45 cw(c3273.14,2418.38) 3273.14,2442.52 cw(c3273.14,2466.66) v1@3256.07,2449.59
  Top Layer w15: v1(1918,1815) R17.2@1966.21,1815 C16.1@1966.21,1735 ; v1@1923.3,1809.7 cw(c1936.11,1796.89) 1936.11,1815 cw(c1936.11,1833.11) v1@1923.3,1820.3 ; R17.2@1951.34,1802.63 ccw(c1921.46,1772.75) 1921.46,1815 ccw(c1921.46,1857.25) R17.2@1951.34,1827.37 ; C16.1@1953.84,1747.37 ccw(c1923.96,1777.25) 1966.21,1777.25 ccw(c2008.46,1777.25) C16.1@1978.59,1747.37 ; R17.2@1953.84,1802.63 cw(c1923.96,1772.75) 1966.21,1772.75 cw(c2008.46,1772.75) R17.2@1978.59,1802.63
  Bottom Layer w12: v1@1911.64,1821.36 ccw(c1896.27,1836.73) 1918,1836.73 ccw(c1939.73,1836.73) v1@1924.36,1821.36 ; v1(1918,1815) 1918,2428 1932.52,2442.52 v1(3249,2442.52) ; v1@3242.64,2436.16 ccw(c3227.27,2420.79) 3227.27,2442.52 ccw(c3227.27,2464.25) v1@3242.64,2448.88
ADC2: C26.1 R31.1 U19.10 | length 2752.6
  Top Layer w10: U19.10@3312.6,2422.83 v1(3423,2422.83) ; v1@3415.93,2415.76 ccw(c3398.86,2398.69) 3398.86,2422.83 ccw(c3398.86,2446.98) v1@3415.93,2429.91
  Top Layer w15: v1(1884,1976) R31.1@1966.21,1976 C26.1@1966.21,1896 ; v1@1889.3,1970.7 cw(c1902.11,1957.89) 1902.11,1976 cw(c1902.11,1994.11) v1@1889.3,1981.3 ; R31.1@1951.34,1963.63 ccw(c1921.46,1933.75) 1921.46,1976 ccw(c1921.46,2018.25) R31.1@1951.34,1988.37 ; C26.1@1953.84,1908.37 ccw(c1923.96,1938.25) 1966.21,1938.25 ccw(c2008.46,1938.25) C26.1@1978.59,1908.37 ; R31.1@1953.84,1963.63 cw(c1923.96,1933.75) 1966.21,1933.75 cw(c2008.46,1933.75) R31.1@1978.59,1963.63
  Bottom Layer w12: v1@1877.64,1982.36 ccw(c1862.27,1997.73) 1884,1997.73 ccw(c1905.73,1997.73) v1@1890.36,1982.36 ; v1(1884,1976) 1884,2493 1904,2513 3409,2513 3423,2499 v1(3423,2422.83) ; v1@3416.64,2429.2 ccw(c3401.27,2444.56) 3423,2444.56 ccw(c3444.73,2444.56) v1@3429.36,2429.2
ADC3: C28.1 R39.1 U19.11 | length 2125.1
  Top Layer w10: v1(3215,2403.15) U19.11@3312.6,2403.15 ; v1@3222.07,2396.08 cw(c3239.14,2379.01) 3239.14,2403.15 cw(c3239.14,2427.29) v1@3222.07,2410.22
  Top Layer w15: R39.1@1953.84,2068.37 ccw(c1923.96,2098.25) 1966.21,2098.25 ccw(c2008.46,2098.25) R39.1@1978.59,2068.37 ; C28.1@1953.84,2123.63 cw(c1923.96,2093.75) 1966.21,2093.75 cw(c2008.46,2093.75) C28.1@1978.59,2123.63 ; C28.1@1953.84,2148.37 ccw(c1923.96,2178.25) 1966.21,2178.25 ccw(c2008.46,2178.25) C28.1@1978.59,2148.37 ; v1@1960.91,2180.91 cw(c1948.11,2168.11) 1966.21,2168.11 cw(c1984.32,2168.11) v1@1971.52,2180.91 ; R39.1@1966.21,2056 v1@1966.21,2188.21
  Bottom Layer w12: v1(1966.21,2186.21) 2343.79,2186.21 2429,2101 2546,2101 2568,2123 2568,2383 2588.15,2403.15 v1(3215,2403.15) ; v1@1972.58,2179.85 cw(c1987.94,2164.48) 1987.94,2186.21 cw(c1987.94,2207.94) v1@1972.58,2192.58 ; v1@3208.64,2396.79 ccw(c3193.27,2381.42) 3193.27,2403.15 ccw(c3193.27,2424.88) v1@3208.64,2409.51
C1RX: LED2.2 U13.12 U19.59 | length 3856.7
  Top Layer w10: 3501.89,2644.58 ccw(c3529.58,2644.58) v1(3510,2625) 3501.89,2633.11 U19.59@3501.89,2690.87 ; U19.59@3501.89,2668.72 ccw(c3553.72,2668.72) v1@3517.07,2632.07
  Top Layer w12: v1@983.64,3251.36 ccw(c970.17,3264.83) 989.21,3264.83 ; v1@989.21,3245 989.21,3355 999.21,3365 U13.12@1048.71,3365 ; 989.21,3268.63 ccw(c1013.63,3268.63) v1@996.36,3251.36 ; LED2.2@1389.94,3314.06 cw(c1357.51,3281.63) 1403.38,3281.63 cw(c1449.25,3281.63) LED2.2@1416.81,3314.06 ; v1@1397.02,3251.36 ccw(c1381.65,3266.73) 1403.38,3266.73 ccw(c1425.11,3266.73) 1409.74,3251.36 ccw(c1425.11,3266.73) 1425.11,3245 ccw(c1425.11,3223.27) v1@1409.74,3238.64 ; LED2.2@1403.38,3330 v1(1403.38,3245) v1(2130,3245) ; v1@2123.64,3238.64 ccw(c2108.27,3223.27) 2108.27,3245 ccw(c2108.27,3266.73) v1@2123.64,3251.36
  Bottom Layer w12: v1(990,3245) v1(1403.38,3245) ; v1@996.36,3238.64 cw(c1011.73,3223.27) 1011.73,3245 cw(c1011.73,3266.73) v1@996.36,3251.36 ; v1@1397.02,3238.64 ccw(c1381.65,3223.27) 1381.65,3245 ccw(c1381.65,3266.73) v1@1397.02,3251.36 ; v1@2123.64,3238.64 cw(c2108.27,3223.27) 2130,3223.27 cw(c2151.73,3223.27) v1@2136.36,3238.64 ; v1(2130,3245) 2130,2680 2152,2658 3500,2658 3510,2648 v1(3510,2625) ; v1@3503.64,2631.36 ccw(c3488.27,2646.73) 3510,2646.73 ccw(c3531.73,2646.73) v1@3516.36,2631.36
C1TX: LED3.2 U13.10 U13.11 U19.58 | length 3802.6
  Top Layer w10: v1@3514.5,2741.35 cw(c3497.43,2724.28) 3521.57,2724.28 cw(c3545.72,2724.28) v1@3528.65,2741.35 ; U19.58@3521.57,2690.87 v1(3521.57,2748.43)
  Top Layer w12: U13.10@1048.71,3315 LED3.2@1213.71,3315 ; U13.11@1048.71,3340 LED3.2@1214.21,3340 ; 1137.66,3315 ccw(c1137.66,3403.55) LED3.2@1200.28,3340.94 ; 1149.74,3340 cw(c1149.74,3268.52) LED3.2@1200.28,3319.06 ; 1166.64,3315 ccw(c1166.64,3374.58) LED3.2@1208.76,3332.45 ; 1178.71,3340 cw(c1178.71,3297.49) LED3.2@1208.76,3327.55 ; 1185.95,3340 ccw(c1185.95,3360.26) LED3.2@1200.28,3345.94 ; LED3.2@1200.28,3314.06 cw(c1167.84,3281.63) 1213.71,3281.63 cw(c1259.58,3281.63) LED3.2@1227.15,3314.06 ; LED3.2@1213.71,3330 1213.71,3221.29 1240,3195 v1(2170,3195) ; v1@2163.64,3188.64 ccw(c2148.27,3173.27) 2148.27,3195 ccw(c2148.27,3216.73) v1@2163.64,3201.36
  Bottom Layer w12: v1@2163.64,3188.64 cw(c2148.27,3173.27) 2170,3173.27 cw(c2191.73,3173.27) v1@2176.36,3188.64 ; v1(2170,3195) 2170,2705 2189,2686 3509,2686 3521.57,2698.57 v1(3521.57,2748.43) ; v1@3515.21,2742.06 cw(c3499.85,2726.7) 3521.57,2726.7 cw(c3543.3,2726.7) v1@3527.94,2742.06
C2IR: U10.2 U10.3 U19.15 | length 1227
  Top Layer w10: v1@3097.93,1992.07 ccw(c3080.86,2009.14) 3105,2009.14 ccw(c3129.14,2009.14) v1@3112.07,1992.07 ; v1(3105,1985) 3105,2179 3250.41,2324.41 U19.15@3312.6,2324.41
  Top Layer w15: U10.3@3012.6,1555 3097,1555 3105,1563 v1@3105,1605 ; U10.2@3012.6,1605 v1(3104,1605) ; v1@3098.7,1610.3 cw(c3085.89,1623.11) 3085.89,1605 cw(c3085.89,1586.89) 3098.7,1599.7 cw(c3083.48,1584.48) 3105,1584.48 ; 3105,1589.31 cw(c3119.69,1589.31) v1@3109.3,1599.7
  Bottom Layer w12: v1@3097.64,1611.36 ccw(c3079.86,1629.14) 3105,1629.14 ; v1@3098.64,1978.64 cw(c3083.27,1963.27) 3105,1963.27 cw(c3126.73,1963.27) v1@3111.36,1978.64 ; v1@3105,1605 v1@3105,1978 ; 3105,1624.31 ccw(c3123.31,1624.31) v1@3110.36,1611.36
C2RX: U10.1 U19.17 | length 1163.9
  Top Layer w10: v1(3055,1957) 3185,1957 3200,1972 3200,2205 3264.84,2269.84 3390,2269.84 3403.46,2256.37 U19.17@3403.46,2213.86 ; v1@3062.07,1949.93 cw(c3079.14,1932.86) 3079.14,1957 cw(c3079.14,1981.14) v1@3062.07,1964.07
  Top Layer w15: U10.1@3012.6,1655 v1@3071,1655 ; v1@3064.7,1649.7 ccw(c3051.89,1636.89) 3051.89,1655 ccw(c3051.89,1673.11) v1@3064.7,1660.3
  Bottom Layer w12: v1@3048.64,1950.64 cw(c3033.27,1935.27) 3055,1935.27 cw(c3076.73,1935.27) v1@3061.36,1950.64 ; v1(3055,1957) 3055,1800 3070,1785 v1(3070,1655) ; v1@3063.64,1661.36 ccw(c3048.27,1676.73) 3070,1676.73 ccw(c3091.73,1676.73) v1@3076.36,1661.36
C2TX: U10.4 U19.16 | length 1160.7
  Top Layer w10: v1@3148.93,1993.07 ccw(c3131.86,2010.14) 3156,2010.14 ccw(c3180.14,2010.14) v1@3163.07,1993.07 ; v1(3156,1986) 3156,2192.72 3268,2304.72 U19.16@3312.6,2304.72
  Top Layer w15: U10.4@3012.6,1505 v1(3156,1505) ; v1@3150.7,1499.7 ccw(c3137.89,1486.89) 3137.89,1505 ccw(c3137.89,1523.11) v1@3150.7,1510.3
  Bottom Layer w12: v1@3149.64,1511.36 ccw(c3134.27,1526.73) 3156,1526.73 ccw(c3177.73,1526.73) v1@3162.36,1511.36 ; v1@3149.64,1979.64 cw(c3134.27,1964.27) 3156,1964.27 cw(c3177.73,1964.27) v1@3162.36,1979.64 ; v1@3156,1506 v1@3156,1979
C3RX: R52.2 U17.3 U19.30 | length 4154.4
  Top Layer w10: U19.30@3659.37,2213.86 3659.37,2254.37 3670.43,2265.43 ; v1@3665.76,2273.15 cw(c3661.69,2265.43) 3670.43,2265.43 ; v1@3675.09,2273.15 ccw(c3679.16,2265.43) 3670.43,2265.43 ; v1@3677.5,2274.93 cw(c3694.57,2257.86) 3694.57,2282 cw(c3694.57,2306.14) v1@3677.5,2289.07 ; v1@3818.93,1959.07 ccw(c3799.44,1978.56) 3827,1978.56 ; v1@3827,1953 3827,2235 3812,2250 3735,2250 3703,2282 v1(3670.43,2282) 3670.43,2265.43 ; 3827,1973.73 ccw(c3847.73,1973.73) v1@3833.07,1959.07
  Top Layer w15: v1(4272.83,3425.61) U17.3@4329.21,3425.61 ; v1@4278.13,3420.31 cw(c4290.93,3407.51) 4290.93,3425.61 cw(c4290.93,3443.72) v1@4278.13,3430.92 ; R52.2@4831.84,1615.13 cw(c4801.96,1585.25) 4844.21,1585.25 cw(c4886.46,1585.25) R52.2@4856.59,1615.13 ; v1@4838.91,1578.09 ccw(c4826.11,1590.89) 4844.21,1590.89 ccw(c4862.32,1590.89) v1@4849.52,1578.09 ; v1(4844.21,1572.79) R52.2@4844.21,1630
  Bottom Layer w12: v1@3664.06,2275.64 ccw(c3648.7,2260.27) 3648.7,2282 ccw(c3648.7,2303.73) v1@3664.06,2288.36 ; v1(3670.43,2282) 3623,2282 3605,2300 3605,2485 3621.57,2501.57 3771.57,2501.57 3785,2515 3785,2693 3843,2751 3843,2953 3904,3014 3904,3408 3921.61,3425.61 v1(4272.83,3425.61) ; v1@3827,1953 4826,1953 4844.21,1934.79 v1(4844.21,1572.79) ; v1@3832.36,1945.64 cw(c3850.14,1927.86) 3850.14,1953 ; v1@3832.36,1958.36 ccw(c3845.31,1971.31) 3845.31,1953 ; v1@4266.46,3419.25 ccw(c4251.1,3403.89) 4251.1,3425.61 ccw(c4251.1,3447.34) v1@4266.46,3431.98 ; v1@4837.85,1579.15 ccw(c4822.48,1594.52) 4844.21,1594.52 ccw(c4865.94,1594.52) v1@4850.58,1579.15
  other v1: 3826,1952
C3TX: R51.2 U17.1 U19.29 | length 4502.8
  Top Layer w10: v1@3633.35,2311.93 cw(c3618.07,2296.64) 3639.68,2296.64 ; 3639.68,2293.07 cw(c3666.35,2293.07) 3647.5,2311.93 cw(c3664.57,2294.86) 3664.57,2319 cw(c3664.57,2343.14) v1@3647.5,2326.07 ; v1@3639.68,2318.26 U19.29@3639.68,2213.86 U19.29@3640.43,2214.6 ; v1(3640.43,2319) 3706,2319 3753,2272 3837,2272 3854,2255 v1@3854,1980 ; v1@3848.93,1989.07 ccw(c3836.69,2001.31) 3854,2001.31 ; 3854,2010.97 ccw(c3884.97,2010.97) v1@3863.07,1989.07
  Top Layer w15: U17.1@4329.21,3525.61 v1@4390.61,3525.61 ; 4371.96,3525.61 ccw(c4371.96,3545.04) v1@4385.7,3531.3 ; 4373.82,3525.61 cw(c4373.82,3508.82) v1@4385.7,3520.7 ; R51.2@4991.84,1615.13 cw(c4961.96,1585.25) 5004.21,1585.25 cw(c5046.46,1585.25) R51.2@5016.59,1615.13 ; v1@4998.91,1579.09 ccw(c4986.11,1591.89) 5004.21,1591.89 ccw(c5022.32,1591.89) v1@5009.52,1579.09 ; v1(5004.21,1573.79) R51.2@5004.21,1630
  Bottom Layer w12: v1@3634.06,2325.36 ccw(c3618.7,2340.73) 3640.43,2340.73 ccw(c3662.15,2340.73) v1@3646.79,2325.36 ; v1(3640.43,2319) 3640.43,2458.43 3655,2473 3791,2473 3806,2488 3806,2683 3871,2748 3871,2942 3937,3008 3937,3376 3952,3391 4378,3391 4391,3404 v1(4391,3526) ; v1@3854,1980 4983,1980 5004.21,1958.79 v1(5004.21,1573.79) ; v1@3862.36,1975.64 cw(c3872.9,1965.1) 3872.9,1980 ; v1@3862.36,1988.36 ccw(c3882.56,2008.56) 3882.56,1980 ; v1@4384.64,3519.64 cw(c4369.27,3504.27) 4391,3504.27 cw(c4412.73,3504.27) v1@4397.36,3519.64 ; v1@4997.85,1580.15 ccw(c4982.48,1595.52) 5004.21,1595.52 ccw(c5025.94,1595.52) v1@5010.58,1580.15
  other v1: 3856,1982
DCK: U19.50 U21.11 | length 910.3
  Top Layer w10: U19.50@3679.06,2690.87 3679.06,2641.94 v1(3692,2629) ; v1@3689.5,2626.5 v1@3692,2624
  Top Layer w15: v1(3740.39,3285.39) U21.11@3799.21,3285.39 ; v1@3745.69,3280.08 cw(c3758.49,3267.28) 3758.49,3285.39 cw(c3758.49,3303.49) v1@3745.69,3290.69
  Bottom Layer w10: v1@3684.93,2636.07 ccw(c3667.86,2653.14) 3692,2653.14 ccw(c3716.14,2653.14) v1@3699.07,2636.07 ; v1(3692,2629) 3692,2724 3740.39,2772.39 v1(3740.39,3285.39) ; v1@3733.31,3278.31 cw(c3716.24,3261.24) 3740.39,3261.24 cw(c3764.53,3261.24) v1@3747.46,3278.31
DDA: U19.52 U21.14 | length 1140.7
  Top Layer w10: v1(3625,2622) 3639.68,2636.68 U19.52@3639.68,2690.87
  Top Layer w15: v1(3669.61,3435.39) U21.14@3799.21,3435.39 ; v1@3674.92,3430.08 cw(c3687.72,3417.28) 3687.72,3435.39 cw(c3687.72,3453.49) v1@3674.92,3440.69
  Bottom Layer w10: v1@3617.93,2629.07 ccw(c3600.86,2646.14) 3625,2646.14 ccw(c3649.14,2646.14) v1@3632.07,2629.07 ; v1(3625,2622) 3625,2736 3669.61,2780.61 v1(3669.61,3435.39) ; v1@3662.54,3428.31 cw(c3645.47,3411.24) 3669.61,3411.24 cw(c3693.76,3411.24) v1@3676.69,3428.31
DIG1: R62.1 U19.54 | length 1105.4
  Top Layer w10: U19.54@3600.31,2690.87 3600.31,2754.31 v1@3615,2769 ; v1@3603.8,2766.08 cw(c3595.21,2762.42) 3601.82,2755.82 cw(c3611.97,2745.66) v1@3612.58,2760.01
  Top Layer w15: R62.1@3356.84,3345.13 cw(c3326.96,3315.25) 3369.21,3315.25 cw(c3411.46,3315.25) R62.1@3381.59,3345.13 ; v1@3363.91,3311.09 ccw(c3351.11,3323.89) 3369.21,3323.89 ccw(c3387.32,3323.89) v1@3374.52,3311.09 ; v1(3369.21,3305.79) R62.1@3369.21,3360
  Bottom Layer w10: v1@3362.14,3298.72 cw(c3345.07,3281.65) 3369.21,3281.65 cw(c3393.35,3281.65) v1@3376.28,3298.72 ; v1(3369.21,3305.79) 3369.21,2982.79 3377,2975 3607,2975 3615,2967 v1@3615,2769 ; v1@3605.93,2777.07 ccw(c3584.03,2798.97) 3615,2798.97 ; 3615,2789.31 ccw(c3632.31,2789.31) v1@3620.07,2777.07
  other v1: 3613,2770
DIG2: R63.1 U19.55 | length 1322
  Top Layer w10: v1@3573.56,2632.7 ccw(c3556.49,2649.77) 3580.63,2649.77 ccw(c3604.77,2649.77) v1@3587.7,2632.7 ; v1(3580.63,2625.63) U19.55@3580.63,2690.87
  Top Layer w15: R63.1@3261.84,3345.13 cw(c3231.96,3315.25) 3274.21,3315.25 cw(c3316.46,3315.25) R63.1@3286.59,3345.13 ; v1@3268.91,3311.09 ccw(c3256.11,3323.89) 3274.21,3323.89 ccw(c3292.32,3323.89) v1@3279.52,3311.09 ; v1(3274.21,3305.79) R63.1@3274.21,3360
  Bottom Layer w10: v1@3267.14,3298.72 cw(c3250.07,3281.65) 3274.21,3281.65 cw(c3298.35,3281.65) v1@3281.28,3298.72 ; v1(3274.21,3305.79) 3274.21,2946.79 3281,2940 3584,2940 3592,2932 3592,2797 3580.63,2785.63 v1(3580.63,2625.63) ; v1@3573.56,2632.7 ccw(c3556.49,2649.77) 3580.63,2649.77 ccw(c3604.77,2649.77) v1@3587.7,2632.7
DIG3: R69.1 U19.56 | length 1251.4
  Top Layer w10: v1@3553.87,2801.98 cw(c3536.8,2784.91) 3560.94,2784.91 cw(c3585.09,2784.91) v1@3568.02,2801.98 ; U19.56@3560.94,2690.87 v1(3560.94,2809.06)
  Top Layer w15: R69.1@3166.84,3345.13 cw(c3136.96,3315.25) 3179.21,3315.25 cw(c3221.46,3315.25) R69.1@3191.59,3345.13 ; v1@3173.91,3311.09 ccw(c3161.11,3323.89) 3179.21,3323.89 ccw(c3197.32,3323.89) v1@3184.52,3311.09 ; v1(3179.21,3305.79) R69.1@3179.21,3360
  Bottom Layer w10: v1@3172.14,3298.72 cw(c3155.07,3281.65) 3179.21,3281.65 cw(c3203.35,3281.65) v1@3186.28,3298.72 ; v1(3179.21,3305.79) 3179.21,2822.79 3192.94,2809.06 v1(3560.94,2809.06) ; v1@3553.87,2801.98 ccw(c3536.8,2784.91) 3536.8,2809.06 ccw(c3536.8,2833.2) v1@3553.87,2816.13
DIG4: R74.1 U19.57 | length 1497.3
  Top Layer w10: v1@3534.19,2593.33 ccw(c3517.12,2610.4) 3541.26,2610.4 ccw(c3565.4,2610.4) v1@3548.33,2593.33 ; v1(3541.26,2586.26) U19.57@3541.26,2690.87
  Top Layer w15: R74.1@3071.84,3345.13 cw(c3041.96,3315.25) 3084.21,3315.25 cw(c3126.46,3315.25) R74.1@3096.59,3345.13 ; v1@3078.91,3311.09 ccw(c3066.11,3323.89) 3084.21,3323.89 ccw(c3102.32,3323.89) v1@3089.52,3311.09 ; v1(3084.21,3305.79) R74.1@3084.21,3360
  Bottom Layer w10: v1@3077.14,3298.72 cw(c3060.07,3281.65) 3084.21,3281.65 cw(c3108.35,3281.65) v1@3091.28,3298.72 ; v1(3084.21,3305.79) 3084.21,3116.79 3159,3042 3159,2801 3175,2785 3540,2785 3550,2775 3550,2651 3541.26,2642.26 v1(3541.26,2586.26) ; v1@3534.19,2593.33 ccw(c3517.12,2610.4) 3541.26,2610.4 ccw(c3565.4,2610.4) v1@3548.33,2593.33
DIN1: D12.K J4.1 | length 264.5
  Top Layer w60: J4.1@2028.18,311.81 ccw(c1987.05,352.94) 2045.21,352.94 ; J4.1@2045.21,331.2 D12.K@2045.21,550
DIN2: D11.K J4.3 | length 487.3
  Top Layer w60: J4.3@2341.76,327.76 2341.76,492.55 2399.21,550 D11.K@2585.21,550 ; 2522.36,550 ccw(c2522.36,620.36) D11.K@2572.11,570.61
DK1: R23.1 U12.6 U19.39 | length 3865.8
  Top Layer w10: U19.39@3789.61,2422.83 3867.83,2422.83 3900,2455 ; 3868.79,2423.79 cw(c3920,2372.57) v1@3920,2445 ; 3885.86,2440.86 cw(c3920,2406.72) v1(3920,2455) ccw(c3910.15,2441.42) 3898.28,2453.28 ; 3890,2445 cw(c3903.18,2431.82) v1@3914.13,2446.91 ; 3902.93,2457.93 cw(c3920,2440.86) v1@3920,2465 ; v1@3912,2449 ccw(c3900,2440) 3900,2455 ; v1@3912,2461 cw(c3900,2470) 3900,2455 ; v1@3927.07,2447.93 cw(c3944.14,2430.86) 3944.14,2455 cw(c3944.14,2479.14) v1@3927.07,2462.07 ; R23.1@3955.96,2440.86 ccw(c3921.81,2406.72) 3921.81,2455 ccw(c3921.81,2503.28) R23.1@3955.96,2469.14 ; R23.1@3972.6,2455 3900,2455
  Top Layer w12: v1(3265,1845) v1(3750,1845) ; v1@3271.36,1838.64 cw(c3286.73,1823.27) 3286.73,1845 cw(c3286.73,1866.73) v1@3271.36,1851.36 ; v1@3743.64,1838.64 ccw(c3728.27,1823.27) 3728.27,1845 ccw(c3728.27,1866.73) v1@3743.64,1851.36
  Top Layer w15: U12.6@1929.2,1322.51 ccw(c1914.69,1337.02) 1935.21,1337.02 ccw(c1955.73,1337.02) U12.6@1941.22,1322.51 ; U12.6@1935.21,1295 1935.21,1409.21 1967,1441 v1(3265,1441) ; v1@3259.7,1435.7 ccw(c3246.89,1422.89) 3246.89,1441 ccw(c3246.89,1459.11) v1@3259.7,1446.3
  Bottom Layer w10: v1@3742.93,1852.07 ccw(c3725.86,1869.14) 3750,1869.14 ccw(c3774.14,1869.14) v1@3757.07,1852.07 ; v1(3750,1845) 3750,2395 3810,2455 v1(3920,2455) ; v1@3912.93,2447.93 ccw(c3895.86,2430.86) 3895.86,2455 ccw(c3895.86,2479.14) v1@3912.93,2462.07
  Bottom Layer w12: v1@3258.64,1447.36 ccw(c3243.27,1462.73) 3265,1462.73 ccw(c3286.73,1462.73) v1@3271.36,1447.36 ; v1@3258.64,1838.64 cw(c3243.27,1823.27) 3265,1823.27 cw(c3286.73,1823.27) v1@3271.36,1838.64 ; v1(3265,1441) v1(3265,1845)